# Altium PCB PCB1.PcbDoc
Units mm, origin at the board's own origin, x right, y up, seen from the top; angles counter-clockwise.
Board outline 42.35 x 42.35 mm, 4 copper layers (Top Layer, Int1 (GND), Int2 (PWR), Bottom Layer), stack 1.369 mm thick; 58 components, 58 nets, 242 pads, 94 vias.
Unrouted connection lines stored in the file: 11.
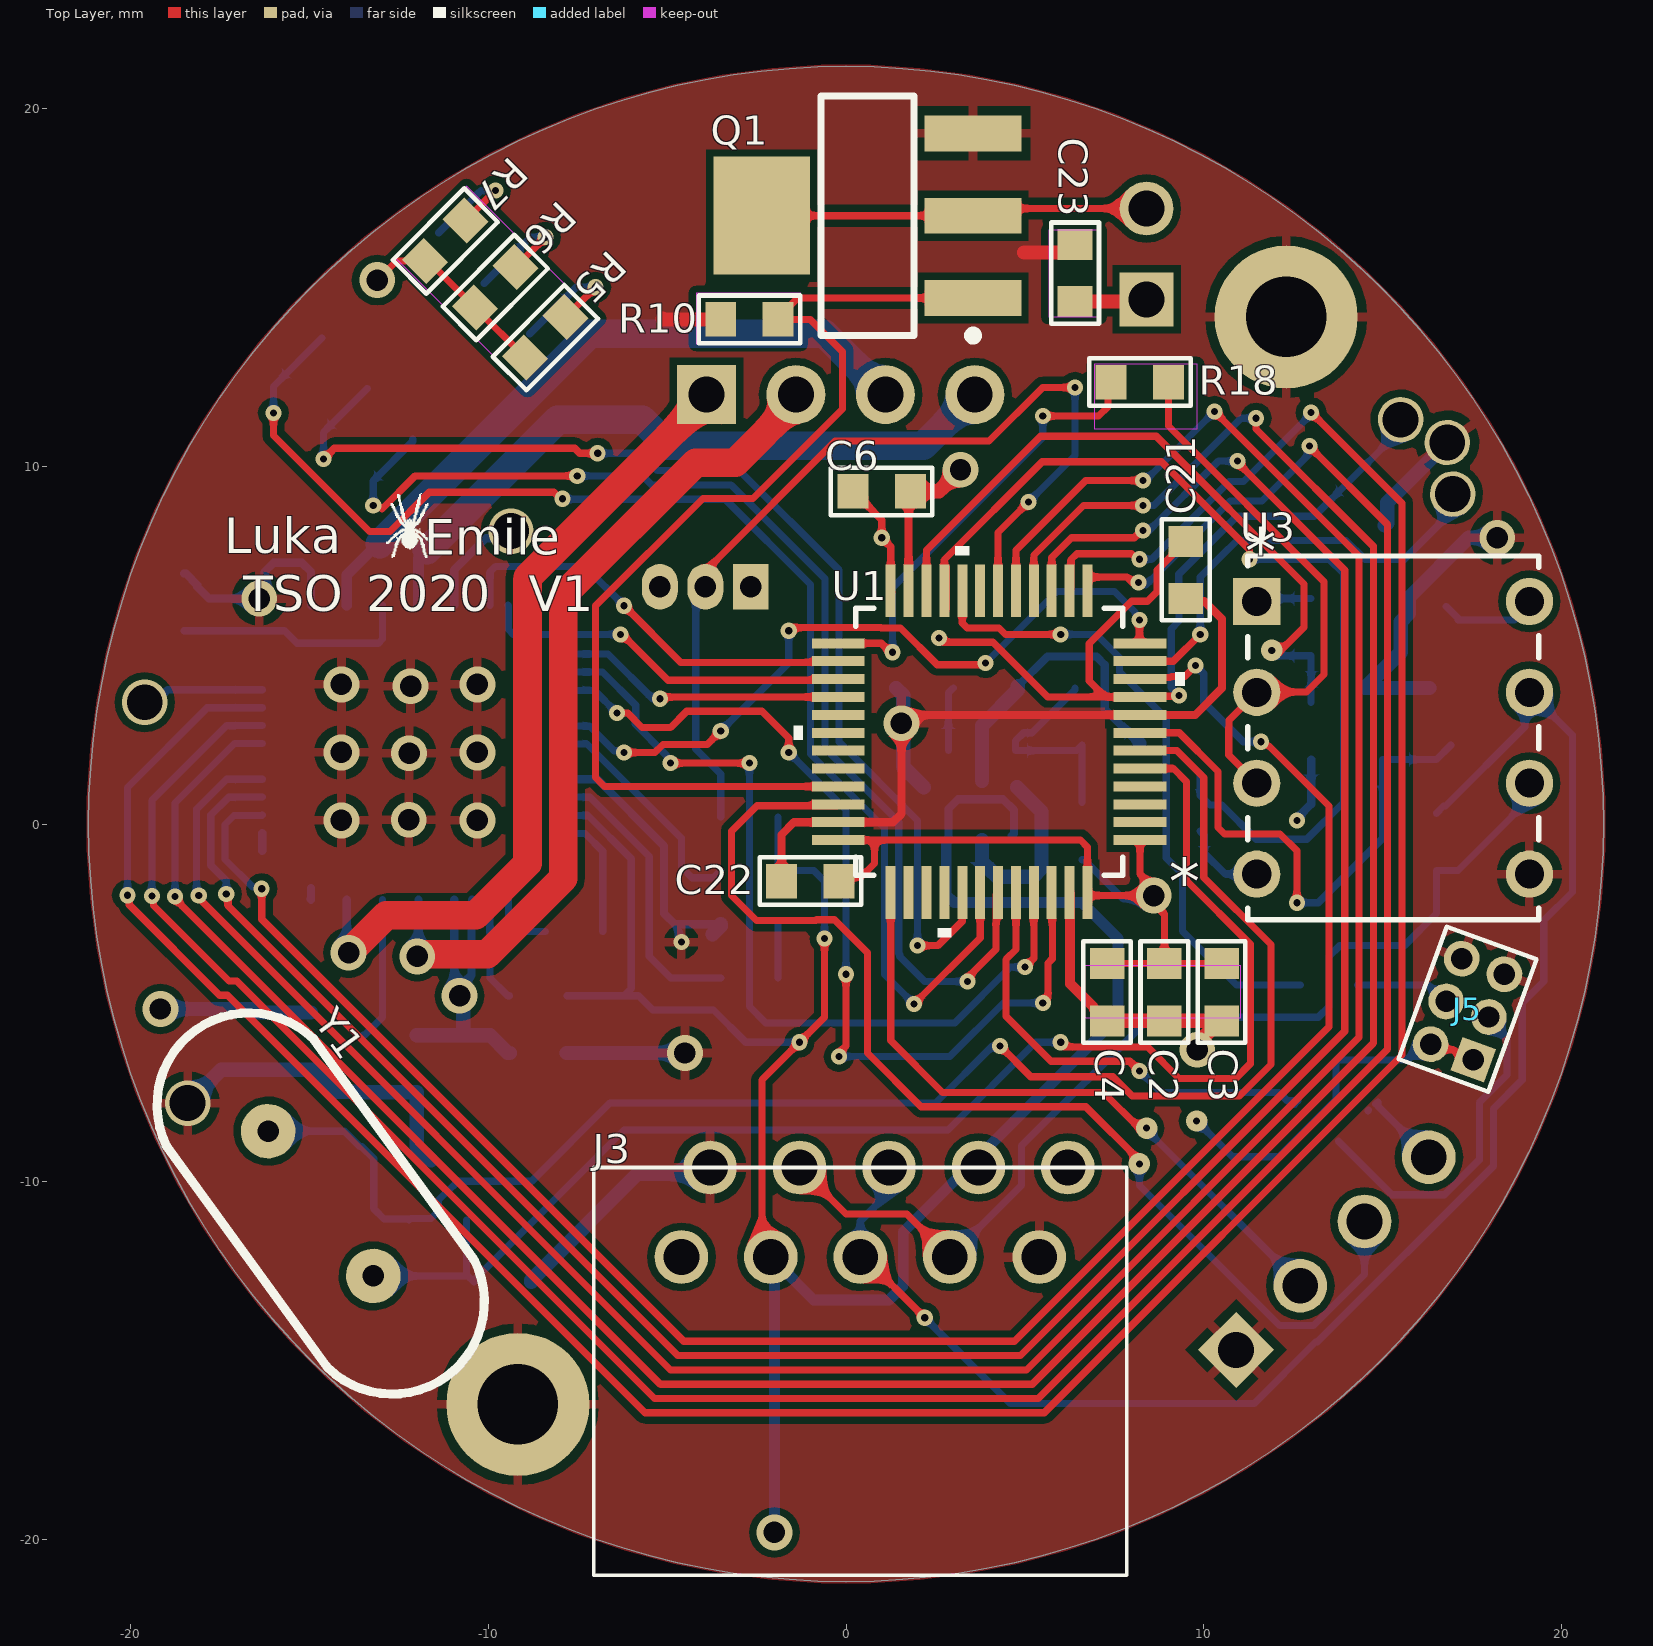
[diagram p0: Top Layer view]
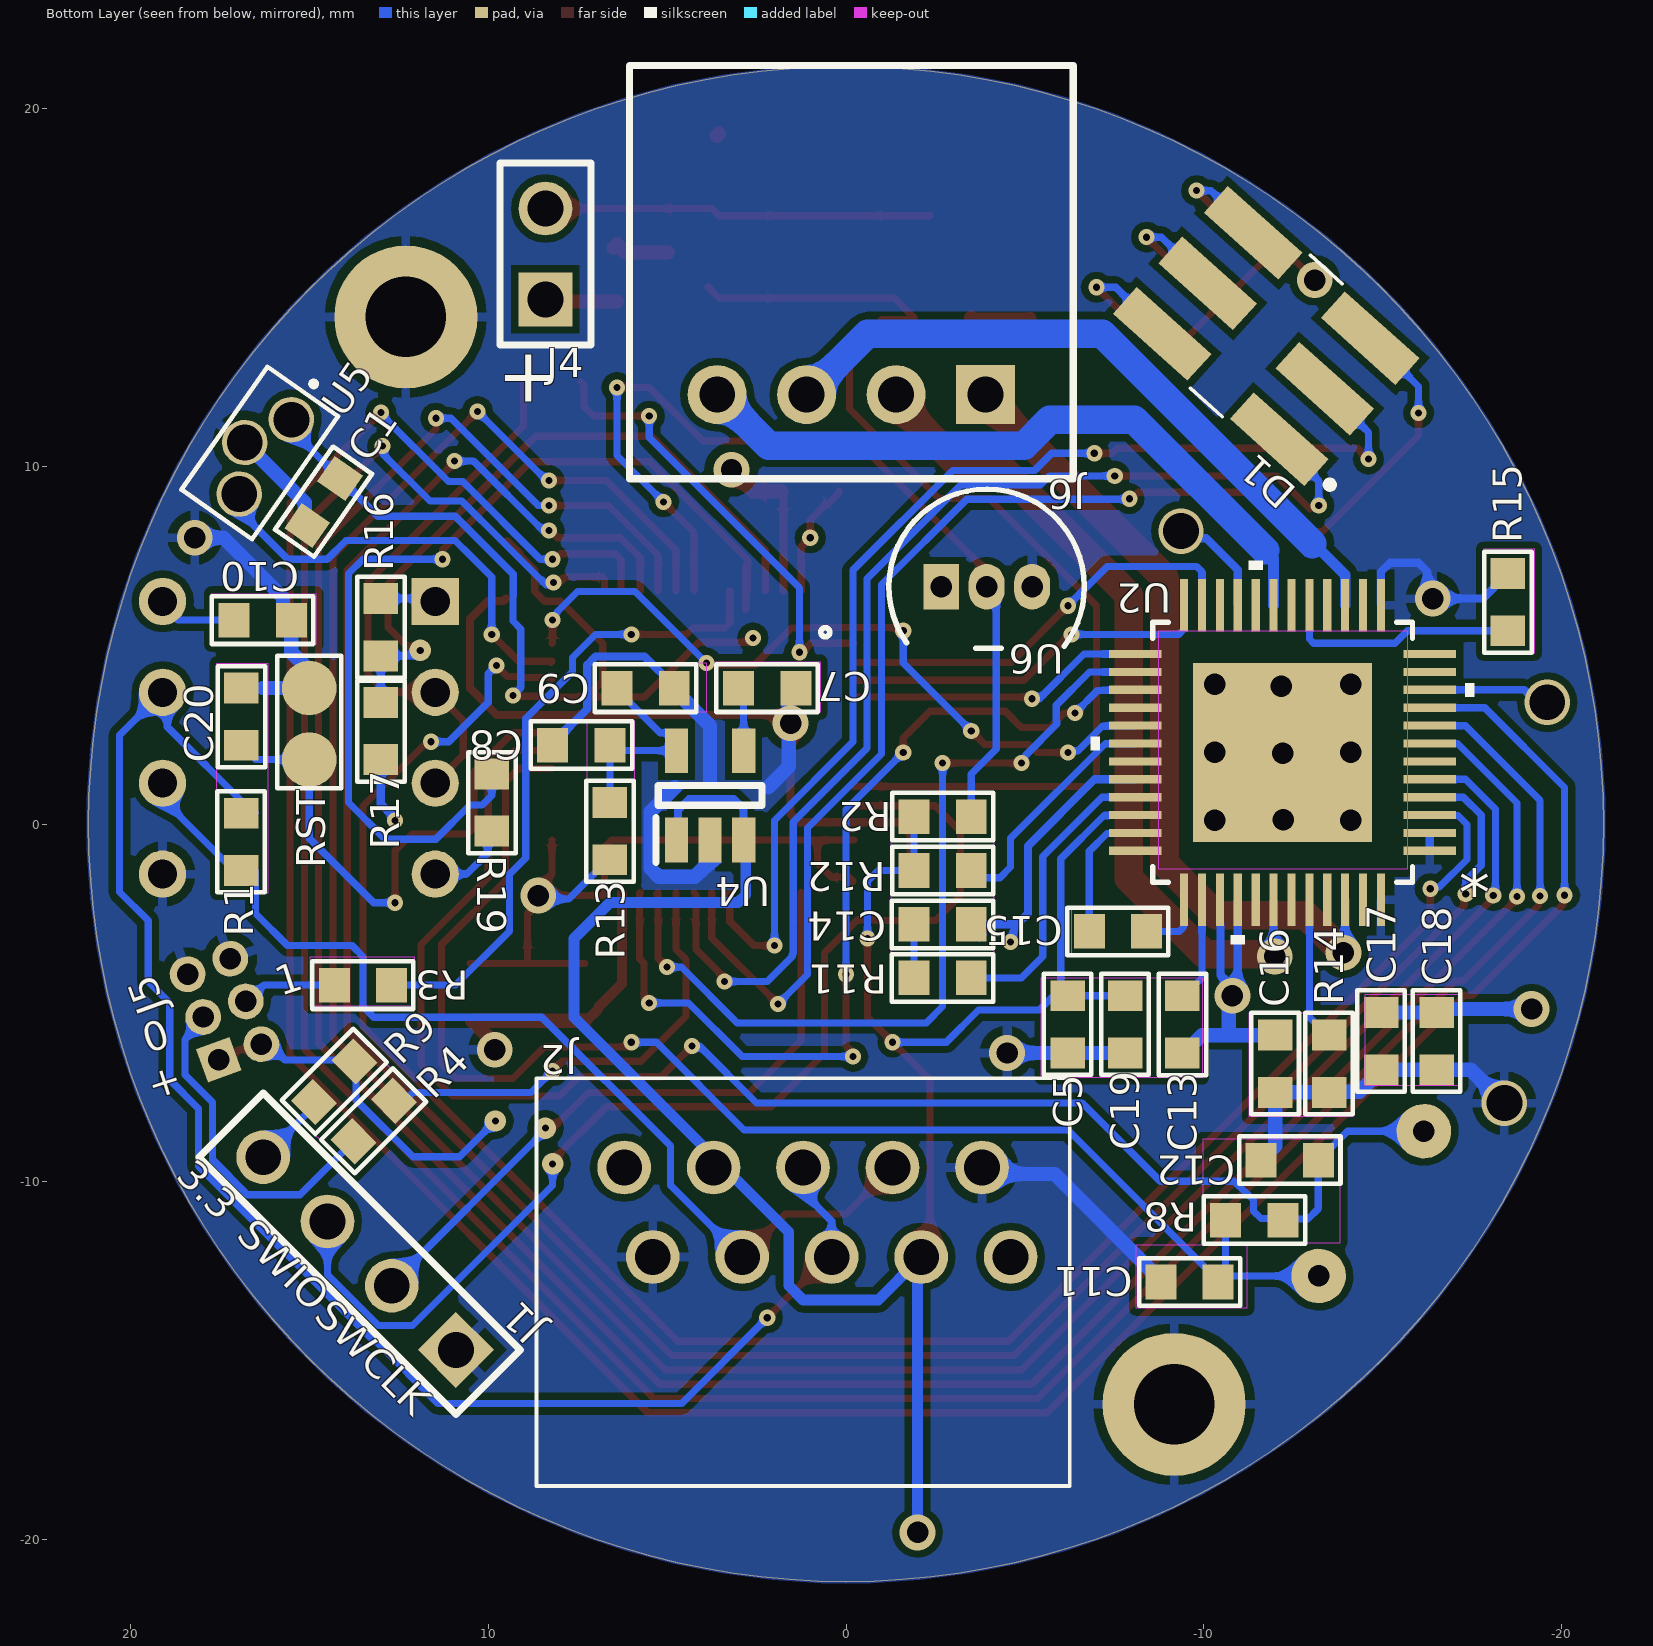
[diagram p1: Bottom Layer view, seen from below]
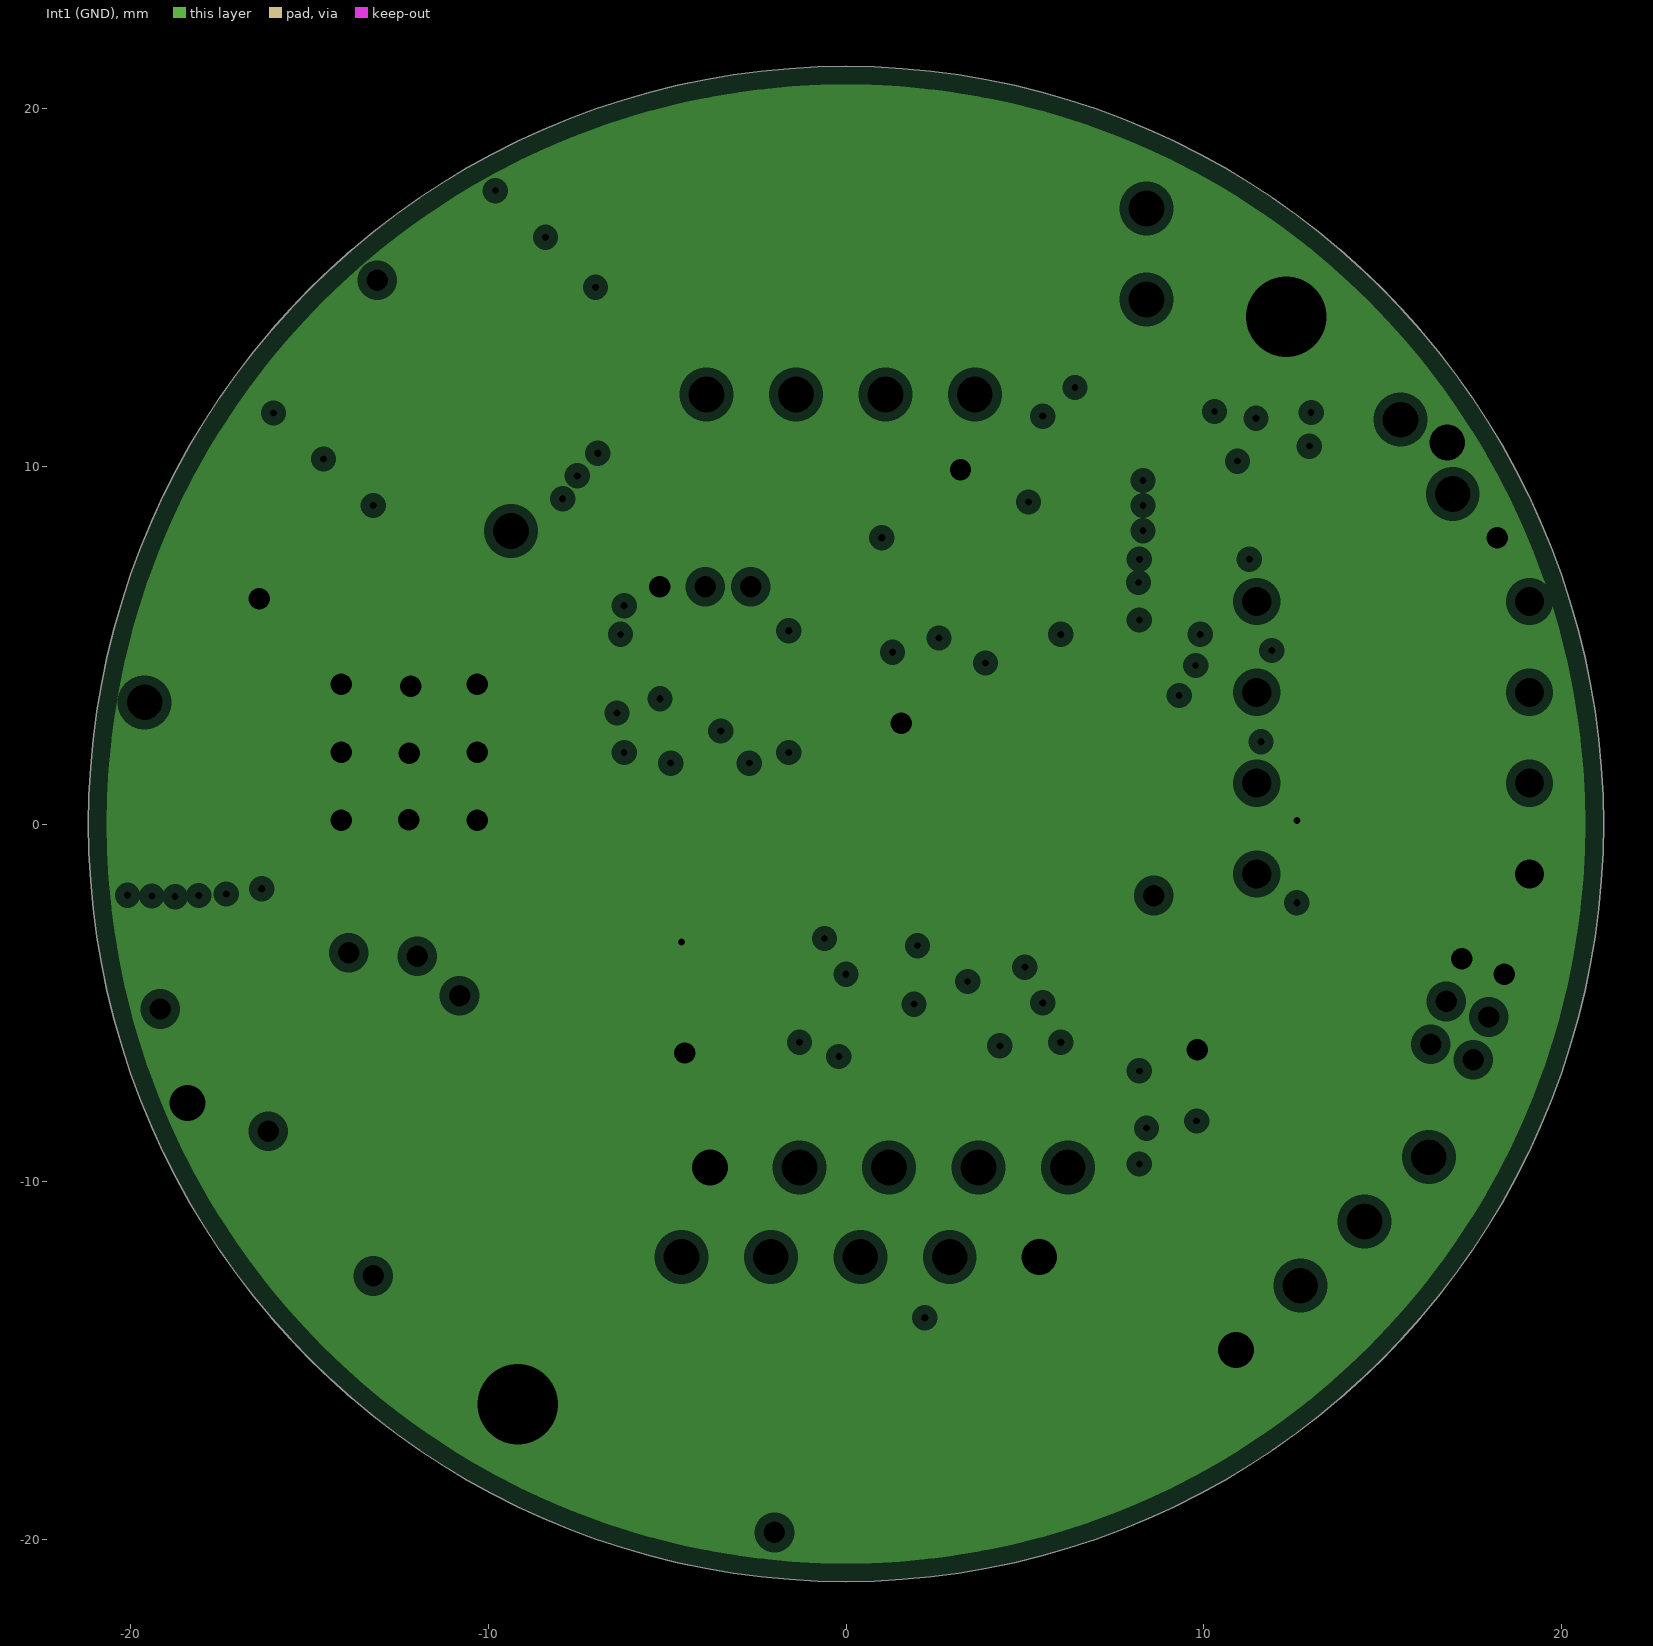
[diagram p2: Int1 (GND), clearances drawn from the general rule]
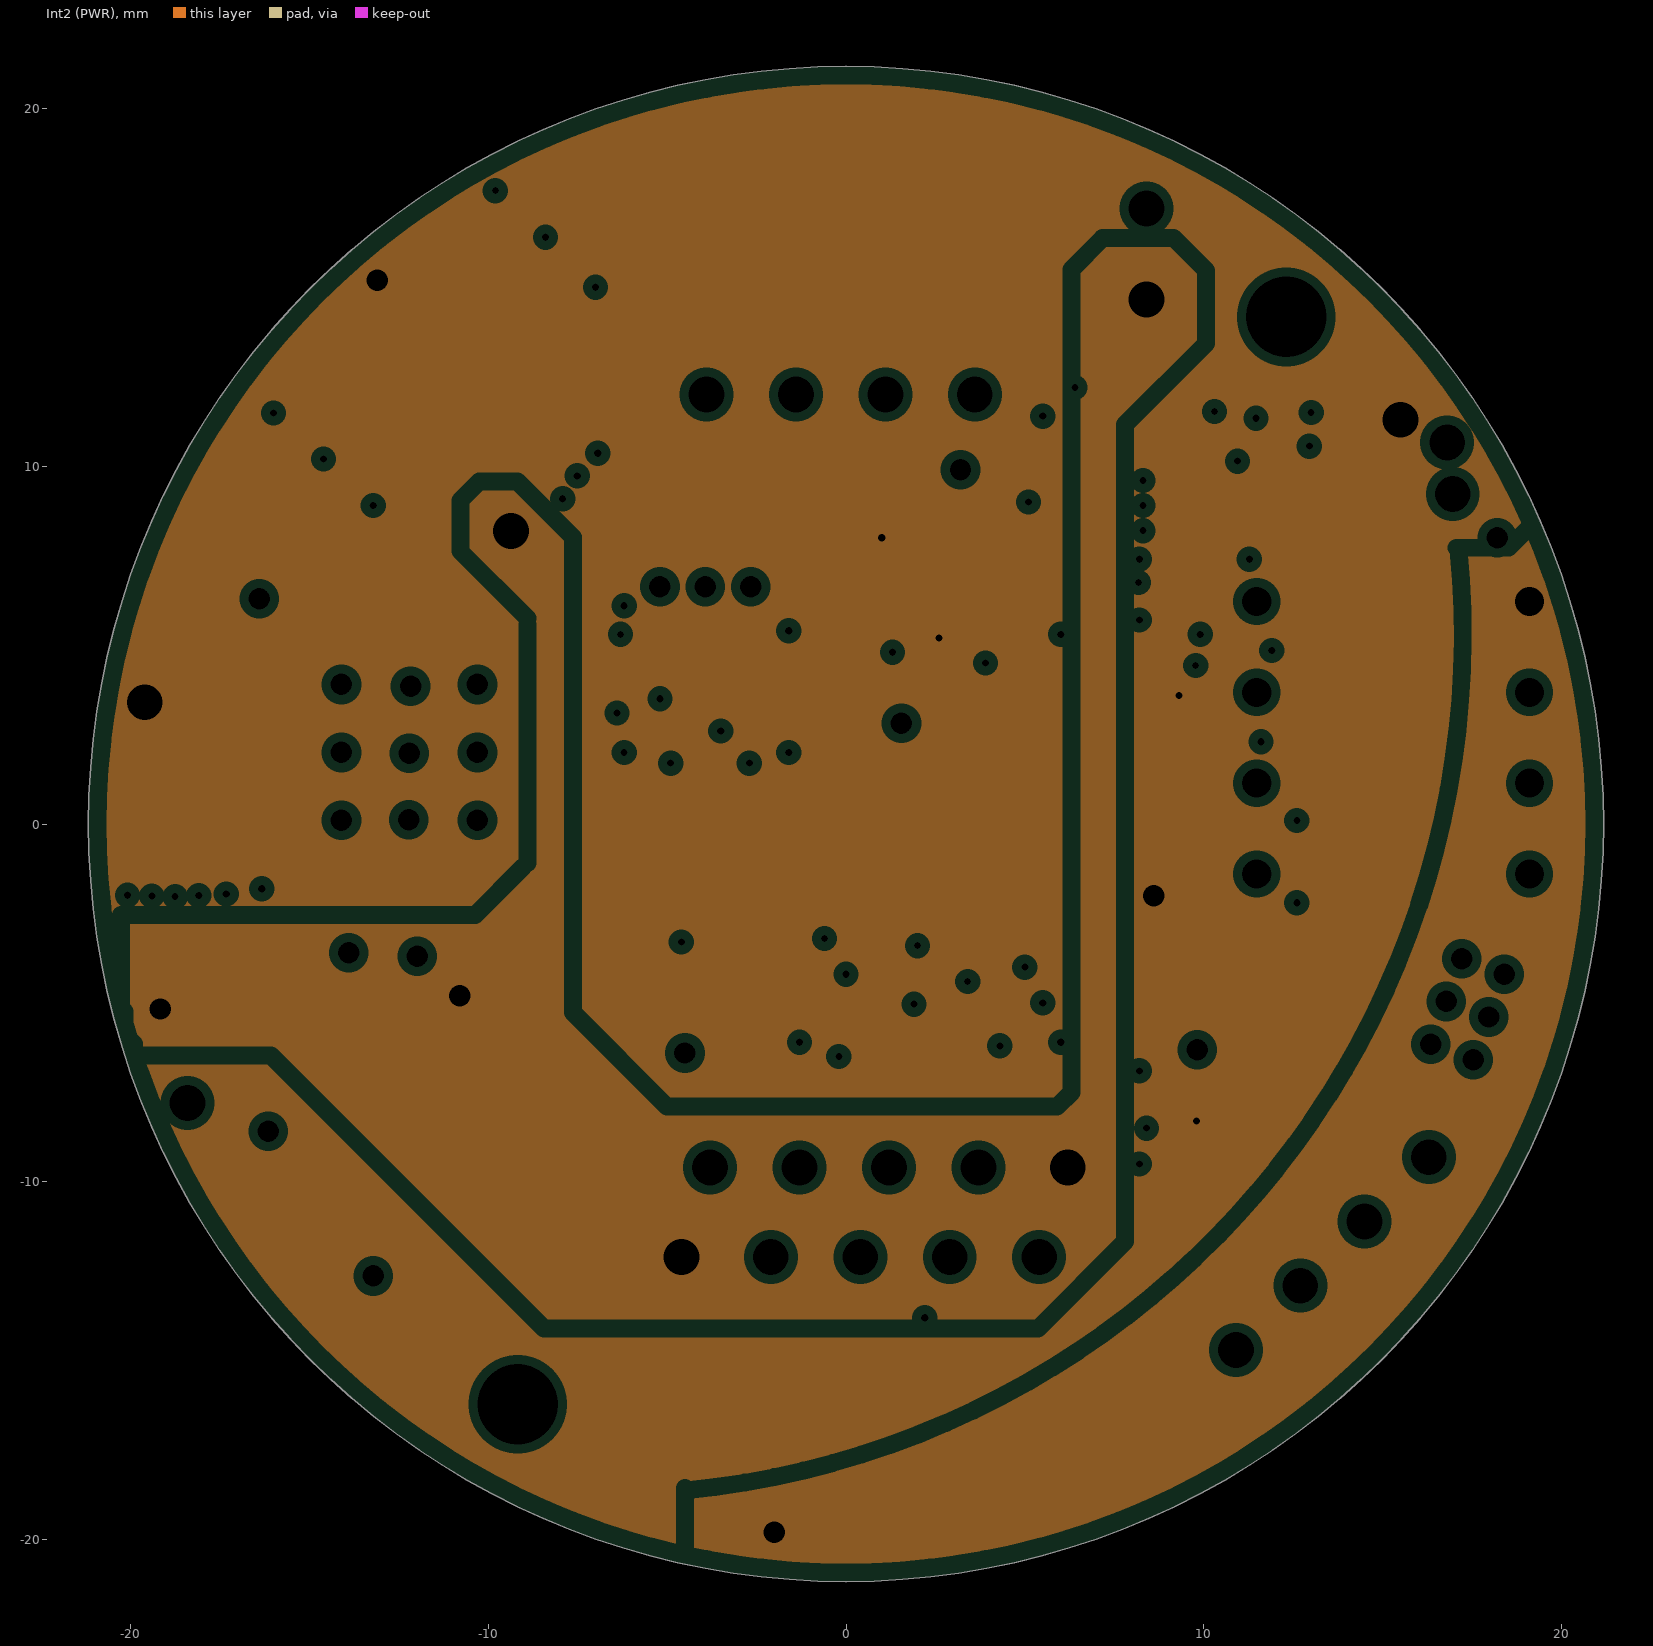
[diagram p3: Int2 (PWR), clearances drawn from the general rule]
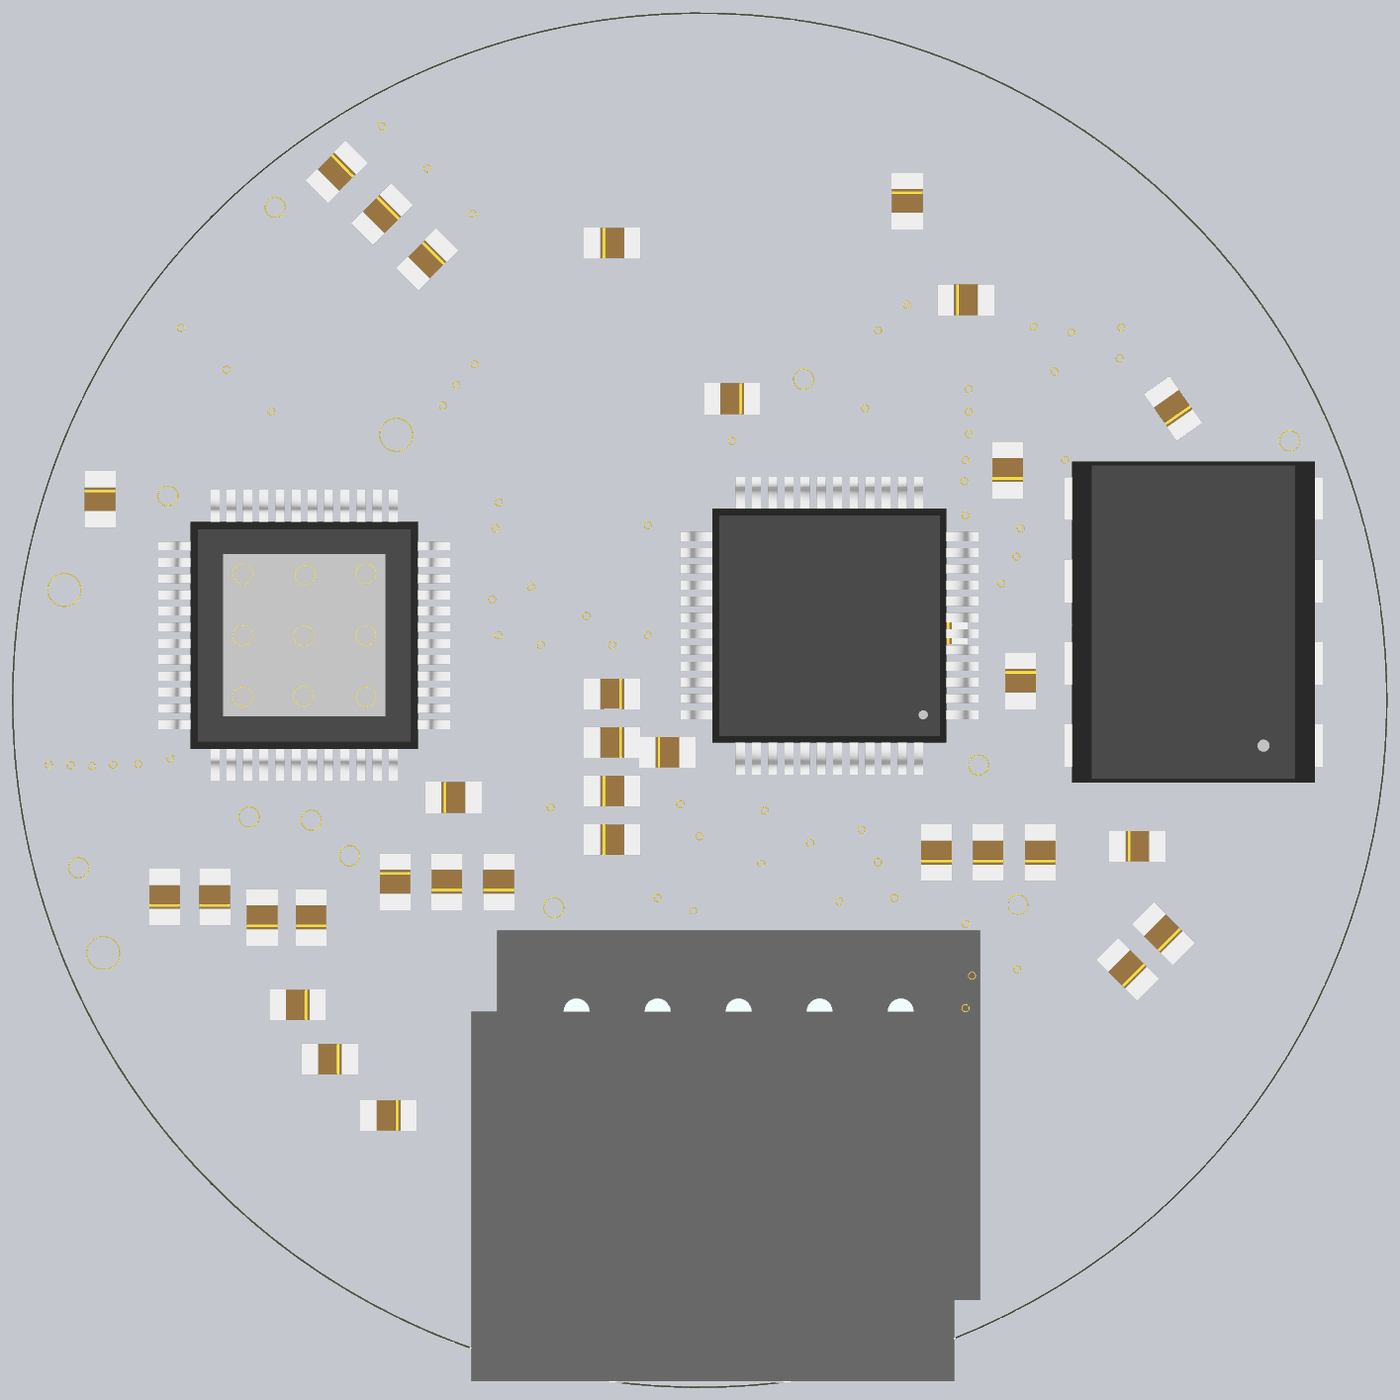
[diagram p4: 3D render of the assembled board from above, using the file's embedded part models]
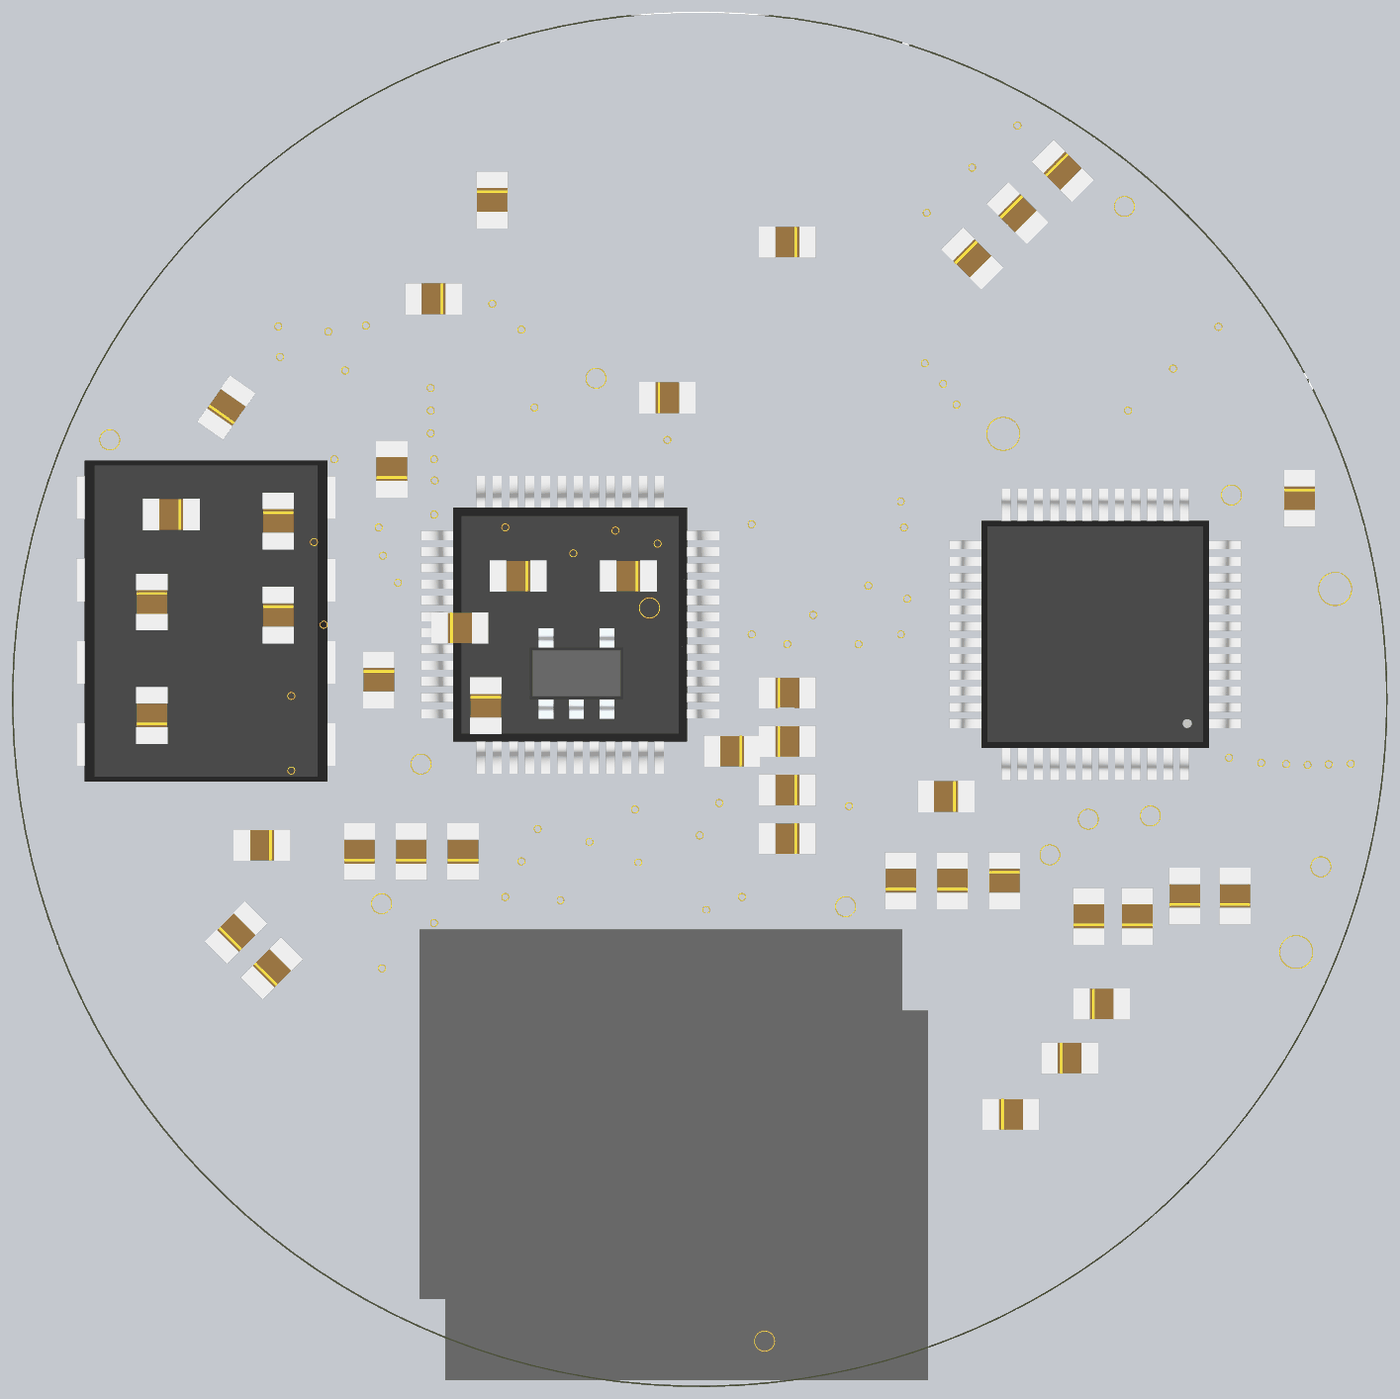
[diagram p5: 3D render of the assembled board from below, using the file's embedded part models]

## Layer stack, top to bottom
Top Solder: solder mask 0.0254, SM-001, Dk 4
Top Layer: signal copper 0.035
Dielectric 1: prepreg 0.1295, PP-017, Dk 4.3
Dielectric 2: prepreg 0.1295, PP-017, Dk 4.3
Int1 (GND): plane copper 0.035, net GND
Dielectric 3: core 0.7112, Core-039, Dk 4.8
Int2 (PWR): plane copper 0.035, net (Multiple Nets)
Dielectric 4: prepreg 0.1295, PP-017, Dk 4.3
Dielectric 5: prepreg 0.1295, PP-017, Dk 4.3
Bottom Layer: signal copper 0.035
Bottom Solder: solder mask 0.0254, SM-001, Dk 4

## Board outline
-21.173,0 ccw(c0,0) 0,-21.173 ccw(c0,0) 21.173,0 ccw(c0,0) 0,21.173 ccw(c0,0)

## Design rules (kind name [scope] priority, off if disabled: settings)
Clearance [All] p1: gap=0.2 ignorepadtopadclearanceinfootprint=TRUE
HoleSize [All] p1 off: absolutevalues=TRUE maxlimit=2.9 minlimit=0.025 maxpercent=80.000 minpercent=20.000
HoleToHoleClearance [All] p1 off: gap=0.254 allowstackedmicrovias=TRUE
MinimumSolderMaskSliver [All] p1 off: minsoldermaskwidth=0.254
PlaneClearance "Larger Routing" [InNet('GND') or InNet('+12') or InNet('OA1') or InNet('OA2') or InNet('OB1') or InNet('OB2')] p1: clearance=0.508
PlaneClearance [All] p2: clearance=0.254
PlaneConnect [All] p1: pad.planeconnectstyle=Relief pad.reliefexpansion=0.508 pad.reliefentries=4 pad.reliefconductorwidth=0.254 pad.reliefairgap=0.254 via.planeconnectstyle=Direct via.reliefexpansion=0.508 via.reliefentries=4 via.reliefconductorwidth=0.254 via.reliefairgap=0.254
PolygonConnect [All] p1: connectstyle=Relief reliefconductorwidth=0.254 reliefentries=4 polygonreliefangle="90 Angle" airgapwidth=0.254
RoutingVias [All] p1: holewidth=0.3 width=0.6 viastyle="Through Hole" minholewidth=0.3 minwidth=0.6 maxholewidth=0.3 maxwidth=0.6
SMDNeckDown [All] p1: percent=50.000
SilkToSilkClearance [All] p1 off: silktosilkclearance=0.254
SilkToSolderMaskClearance [IsPad] p1 off: minsilkscreentomaskgap=0.254 clearancetoexposedcopper=TRUE
SolderMaskExpansion [All] p1 off: expansion=0.102 istentingtop=FALSE
Width "Stepper Wires" [InNet('OA1') or InNet('OA2') or InNet('OB1') or InNet('OB2')] p1: maxlimit=0.8 minlimit=0.229 preferedwidth=0.8 minimp=50.000000 maximp=50.000000 favimp=50.000000
Width "Width Power" [InNet('+12') or InNet('GND') or InNet('5V')] p2: maxlimit=0.4 minlimit=0.2 preferedwidth=0.4 minimp=50.000000 maximp=50.000000 favimp=50.000000
Width [All] p3: maxlimit=0.2 minlimit=0.2 preferedwidth=0.2 minimp=50.000000 maximp=50.000000 favimp=50.000000
23 further rules are at their usual default settings.

## Classes and differential pairs
component class TMC2130: C1 C13 C14 C15 C16 C17 C18 C19 C23 J4 J6 Q1 R2 R10 R11 R12 R14 R15 U2 U5 U6
component class STM32: C2 C3 C4 C5 C6 C7 C8 C9 C10 C11 C12 C20 C21 C22 D1 D2 J1 J2 J3 J5 R1 R3 R4 R5 R6 R7 R8 R9 R13 R16 R17 R18 R19 RST U1 U3 U4 Y1

## Components (designator, comment, footprint, x,y, rotation, side; value= is the part's Value field where it differs from the comment)
C1 "Capacitor SMD" 0603 14.6,9 r125 bottom value=0.1uF
C2 "Capacitor SMD" 0603 8.9,-4.7 r90 top value=0.1uF
C3 "Capacitor SMD" 0603 10.5,-4.7 r90 top value=0.1uF
C4 "Capacitor SMD" 0603 7.3,-4.7 r90 top value=0.1uF
C5 "Capacitor SMD" 0603 -6.2,-5.6 r90 bottom value=1uF
C6 "Capacitor SMD" 0603 1,9.3 r180 top value=1uF
C7 "Capacitor SMD" 0603 2.2,3.8 r0 bottom value=22nF
C8 "Capacitor SMD" 0603 7.4,2.2 r180 bottom value=0.1uF
C9 "Capacitor SMD" 0603 5.6,3.8 r0 bottom value=1uF
C10 "Capacitor SMD" 0603 16.3,5.7 r0 bottom value=0.1uF
C11 "Capacitor SMD" 0603 -9.6,-12.8 r180 bottom value=22pF
C12 "Capacitor SMD" 0603 -12.4,-9.4 r180 bottom value=22pF
C13 "Capacitor SMD" 0603 -9.4,-5.6 r270 bottom value=0.1uF
C14 "Capacitor SMD" 0603 -2.7,-2.8 r0 bottom value=0.1uF
C15 "Capacitor SMD" 0603 -7.6,-3 r0 bottom value=0.1uF
C16 "Capacitor SMD" 0603 -12,-6.7 r90 bottom value=0.1uF
C17 "Capacitor SMD" 0603 -14.96,-6.07 r90 bottom value=0.1uF
C18 "Capacitor SMD" 0603 -16.51,-6.07 r90 bottom value=0.1uF
C19 "Capacitor SMD" 0603 -7.8,-5.6 r90 bottom value=0.1uF
C20 "Capacitor SMD" 0603 16.9,3 r270 bottom value=0.1uF
C21 "Capacitor SMD" 0603 9.5,7.1 r90 top value=0.1uF
C22 "Capacitor SMD" 0603 -1,-1.6 r0 top value=4.7uF
C23 "Capacitor SMD" 0603 6.4,15.4 r270 top value=0.1uF
D1 "LED RGB 5050" "LED 5050" -11.744,13.639 r42 bottom
J1 "SWD-PROG" HDR1X4 10.9,-14.7 r45 bottom
J2 "MAIN_IN" "JST 5POS 2.5mm 90°" 6.2,-9.6 r0 bottom
J3 "MAIN_OUT" "JST 5POS 2.5mm 90°" -4.6,-12.1 r180 top
J4 "FAN" HDR1X2 8.4,14.66 r90 bottom
J5 "BOOT" "Header 3x2 1.27mm SMD" 18.4,-4.2 r340 top
J6 "MOTOR" "JST 4POS 2.5mm 90°" -3.9,12 r0 bottom
Q1 "MOSFET N-CH" SOT223_M 0.6,17 r180 top
R1 "Resistor 0603" 0603 16.9,-0.5 r90 bottom value=120R
R2 "Resistor 0603" 0603 -2.7,0.2 r180 bottom value=?K
R3 "Resistor 0603" 0603 13.5,-4.5 r0 bottom value=10K
R4 "Resistor 0603" 0603 13.2,-8.3 r135 bottom value=10K
R5 "Resistor 0603" 0603 -8.4,13.6 r225 top value=3.3R
R6 "Resistor 0603" 0603 -9.8,15 r225 top value=43R
R7 "Resistor 0603" 0603 -11.2,16.3 r225 top value=3.3R
R8 "Resistor 0603" 0603 -11.41,-11.07 r180 bottom value=10M
R9 "Resistor 0603" 0603 14.3,-7.2 r135 bottom value=NP
R10 "Resistor 0603" 0603 -2.7,14.1 r0 top value=10K
R11 "Resistor 0603" 0603 -2.7,-4.3 r0 bottom value=?K
R12 "Resistor 0603" 0603 -2.7,-1.3 r180 bottom value=15K
R13 "Resistor 0603" 0603 6.6,-0.2 r270 bottom value=0R
R14 "Resistor 0603" 0603 -13.5,-6.7 r90 bottom value=0R
R15 "Resistor 0603" 0603 -18.5,6.2 r270 bottom value=0R
R16 "Resistor 0603" 0603 13,5.5 r270 bottom value=1K
R17 "Resistor 0603" 0603 13,2.6 r270 bottom value=1K
R18 "Resistor 0603" 0603 8.21,12.35 r0 top value=0R
R19 "Resistor 0603" 0603 9.9,0.6 r270 bottom value=0R
RST "PAD RST" PAD 15,3.8 r270 bottom
U1 "STM32F103C8T6" LQFP-48 4,2.3 r180 top value=Value
U2 "TMC2130-TA" ETQFP48_9X9 -12.2,2 r0 bottom value=Value
U3 "MAX485CPA+" "DIP 8 - 3D" 19.1,-1.4 r0 top value=Value
U4 "RT9193-28GB" SOT94P279X130-5N 3.8,0.8 r90 bottom
U5 "AH372-P-B" AH372PB 15.5,11.3 r305 bottom
U6 "LM335Z" TO92 -5.2,7.9 r180 bottom value=Value
Y1 "8M" ATS080B-E -13.21,-12.63 r126 top

## Footprints (in the part's own frame and the unit in brackets; to place one, negate y for a bottom-side part, rotate by r counter-clockwise, add the part's x,y. Pads: shape width x height; smd on the part's side, far side on the other; paste and mask are expansions set on the pad)
0603 [mil]
  rect 34x38 smd: 1(-31.5,0) 2(31.5,0)
  silkscreen extent -56,-26 56,26, body extent -34,-19 34,19, height 35
AH372PB [mm]
  round 1.27 hole 1: 1(0,0) 2(1.27,-0.7) 3(2.54,0)
  silkscreen extent -1.22,-1.4 3.37,1.02
ATS080B-E [mil] "Crystal/ Oscillator 8MHz"
  round 60 hole 23.62: 1(0,0) 2(196.85,0)
  silkscreen extent -137,-100 334,100, body extent -151,-100 348,102, height 157
"DIP 8 - 3D" [mil]
  rect 52x52 hole 32: 1(-300,300)
  round 52 hole 32: 2(-300,200) 3(-300,100) 4(-300,0) 5(0,0) 6(0,100) 7(0,200) 8(0,300)
  silkscreen extent -310,-50 10,350, body extent -310,-45 10,345, height 185
ETQFP48_9X9 [mil]
  rect 58x9 smd paste+0 mask+0: 1(-162,108.27) 2(-162,88.58) 3(-162,68.9) 4(-162,49.21) 5(-162,29.53) 6(-162,9.84) 7(-162,-9.84) 8(-162,-29.53) 9(-162,-49.21) 10(-162,-68.9) 11(-162,-88.58) 12(-162,-108.27) 25(162,-108.27) 26(162,-88.58) 27(162,-68.9) 28(162,-49.21) 29(162,-29.53) 30(162,-9.84) 31(162,9.84) 32(162,29.53) 33(162,49.21) 34(162,68.9) 35(162,88.58) 36(162,108.27)
  rect 9x58 smd paste+0 mask+0: 13(-108.27,-162) 14(-88.58,-162) 15(-68.9,-162) 16(-49.21,-162) 17(-29.53,-162) 18(-9.84,-162) 19(9.84,-162) 20(29.53,-162) 21(49.21,-162) 22(68.9,-162) 23(88.58,-162) 24(108.27,-162) 37(108.27,162) 38(88.58,162) 39(68.9,162) 40(49.21,162) 41(29.53,162) 42(9.84,162) 43(-9.84,162) 44(-29.53,162) 45(-49.21,162) 46(-68.9,162) 47(-88.58,162) 48(-108.27,162)
  rect 197x197 smd paste-98 mask+0: EPAD(0,0)
  silkscreen extent -211,-211 211,211, body extent -177,-177 177,177, height 47
HDR1X2 [mm] "Connector; Header; 2 Position"
  rect 1.5x1.5 hole 1: 1(0,0)
  round 1.5 hole 1: 2(2.54,0)
  silkscreen extent -1.27,-1.27 3.81,1.27
HDR1X4 [mm] "Connector; Header; 4 Position"
  rect 1.5x1.5 hole 1: 1(0,0)
  round 1.5 hole 1: 2(2.54,0) 3(5.08,0) 4(7.62,0)
  silkscreen extent -1.27,-1.27 8.89,1.27
"Header 3x2 1.27mm SMD" [mm]
  rect 1x1 hole 0.6: 1(0,-2.54)
  round 1 hole 0.6: 2(-1.27,-2.54) 3(0,-1.27) 4(-1.27,-1.27) 5(0,0) 6(-1.27,0)
  silkscreen extent -1.97,-3.24 0.7,0.7
"JST 4POS 2.5mm 90°" [mm]
  rect 1.65x1.65 hole 1: 1(0,0)
  round 1.65 hole 1: 2(2.5,0) 3(5,0) 4(7.5,0)
  silkscreen extent -2.45,-9.2 9.95,2.35, body extent -2.45,-9.2 9.95,2.35, height 6
"JST 5POS 2.5mm 90°" [mm]
  round 1.5 hole 1: 1(0,0) 2(-2.5,0) 3(-5,0) 4(-7.5,0) 5(-10,0)
  silkscreen extent -12.45,-2.5 2.45,8.9, body extent -12.45,-2.5 2.45,8.9, height 6.1
"LED 5050" [mm]
  rect 2.8x1 smd: 1(-2.2,1.9) 2(2.2,1.9) 3(-2.2,0) 4(2.2,0) 5(-2.2,-1.9) 6(2.2,-1.9)
  silkscreen extent -4.2,-2.5 0.6,2.5, body extent -2.6,-2.5 2.4,2.6, height 2.7
LQFP-48 [mil]
  rect 58x11 smd: 1(-166,108.27) 2(-166,88.58) 3(-166,68.9) 4(-166,49.21) 5(-166,29.53) 6(-166,9.84) 7(-166,-9.84) 8(-166,-29.53) 9(-166,-49.21) 10(-166,-68.9) 11(-166,-88.58) 12(-166,-108.27) 25(166,-108.27) 26(166,-88.58) 27(166,-68.9) 28(166,-49.21) 29(166,-29.53) 30(166,-9.84) 31(166,9.84) 32(166,29.53) 33(166,49.21) 34(166,68.9) 35(166,88.58) 36(166,108.27)
  rect 11x58 smd: 13(-108.27,-166) 14(-88.58,-166) 15(-68.9,-166) 16(-49.21,-166) 17(-29.53,-166) 18(-9.84,-166) 19(9.84,-166) 20(29.53,-166) 21(49.21,-166) 22(68.9,-166) 23(88.58,-166) 24(108.27,-166) 37(108.27,166) 38(88.58,166) 39(68.9,166) 40(49.21,166) 41(29.53,166) 42(9.84,166) 43(-9.84,166) 44(-29.53,166) 45(-49.21,166) 46(-68.9,166) 47(-88.58,166) 48(-108.27,166)
  silkscreen extent -215,-215 215,215, body extent -181,-181 181,181, height 63
PAD [mil] "pad for connection"
  round 60 smd: 1(0,0) 2(78.74,0)
SOT94P279X130-5N [mm]
  rect 1.25x0.65 smd: 1(-1.25,0.94) 2(-1.25,0) 3(-1.25,-0.94) 4(1.25,-0.94) 5(1.25,0.94)
  silkscreen extent -1.88,-1.45 0.27,1.51, body extent -1.4,-1.45 1.4,1.45, height 1.3
SOT223_M [mm] "SOT223, 4-Leads, Body 6.5x3.5mm, Pitch 2.3mm, Lead Span 7mm, IPC Low Density"
  rect 2.7x1 smd: 1(-2.95,2.3) 2(-2.95,0) 3(-2.95,-2.3)
  rect 2.7x3.3 smd: 4(2.95,0)
  silkscreen extent -3.08,-3.35 1.3,3.47, body extent -1.85,-3.35 1.85,3.35, height 1.7
TO92 [mm]
  rect 1x1.27 hole 0.6: 1(-2.54,-1.27)
  oval 1x1.27 hole 0.6: 2(-1.27,-1.27) 3(0,-1.27)
  silkscreen extent -5.91,-2.98 1.46,1.46, body extent -3.81,-2.8 1.27,1.26, height 4

## Part data
C1 C2 C3 C4 C5 C6 C7 C8 C9 C10 C11 C12 C13 C14 C15 C16 C17 C18 C19 C20 C21 C22 C23: "Capacitor SMD 0603", Manufacturer_Part_Number=12065A820JAT2A, Built_By=EMA_UL_Team, Copyright="Copyright (C) 2018 Accelerated Designs. All rights reserved", RefDes=RefDes, Type=DEV, Vendor="AVX Corporation"
D1: library part 150505M173300, "LED", Manufacturer_Name="Wurth Elektronik", Mouser Part Number=710-150505M173300, RS Part Number=1766248P, Datasheet Link=https://katalog.we-online.de/led/datasheet/150505M173300.pdf, Height=1.8mm, Manufacturer_Part_Number=150505M173300, Mouser Price/Stock=https://www.mouser.com/Search/Refine.aspx?Keyword=710-150505M173300, RS Price/Stock=http://uk.rs-online.com/web/p/products/1766248P
J1: library part "Header 4", "Header, 4-Pin", LatestRevisionDate=17-Jul-2002, LatestRevisionNote="Re-released for DXP Platform.", Publisher="Altium Limited"
J2 J3: library part "JST 5POS", "Connector", Manufacturer_Name="JST (JAPAN SOLDERLESS TERMINALS)", Manufacturer_Part_Number=S5B-XH-A-1(LF)(SN), Datasheet Link=http://www.jst-mfg.com/product/pdf/eng/eXH.pdf, Height=6.1mm
J4: library part "Header 2", "Header, 2-Pin", LatestRevisionDate=17-Jul-2002, LatestRevisionNote="Re-released for DXP Platform.", Publisher="Altium Limited"
J5: library part "Header 3X2", "Header, 3-Pin, Dual row", LatestRevisionDate=17-Jul-2002, LatestRevisionNote="Re-released for DXP Platform.", Publisher="Altium Limited"
J6: library part "JST 4POS", "Connector", Manufacturer_Name="JST (JAPAN SOLDERLESS TERMINALS)", Manufacturer_Part_Number=S4B-XH-A(LF)(SN), RS Part Number=8201589P, Datasheet Link=http://www.jst-mfg.com/product/pdf/eng/eXH.pdf, Height=7mm, RS Price/Stock=http://uk.rs-online.com/web/p/products/8201589P
Q1: "55V 7A SOT223", ComponentLink1Description=Datasheet, ComponentLink1URL=https://assets.nexperia.com/documents/data-sheet/BUK9880-55A.pdf, ComponentLink2Description=Digikey, ComponentLink2URL=https://www.digikey.ca/product-detail/en/BUK9880-55A%2fCUX/1727-2230-1-ND/5361200/?itemSeq=318542302
R1 R2 R3 R4 R5 R6 R7 R8 R9 R10 R11 R12 R13 R14 R15 R16 R17 R18 R19: "Resistor 0603 SMD", Manufacturer_Part_Number=ERJ8CWFR024V, Built_By=EMA_Cory, Copyright="Copyright (C) 2018 Accelerated Designs. All rights reserved", RefDes=RefDes, Type=DEV, Vendor=Panasonic
RST: library part PAD, "SMD Pad for contact"
U1: "Integrated Circuit STM32", Built_By=EMA_UL_Team, Copyright="Copyright (C) 2018 Accelerated Designs. All rights reserved", Manufacturer_Part_Number=STM32F103C8T6, RefDes=RefDes, Type=DEV, Vendor=STMicroelectronics
U2: "Motor Driver TMC2130", Built_By=EMA_Jessica, Copyright="Copyright (C) 2016 Accelerated Designs. All rights reserved", Manufacturer_Part_Number=TMC2130-TA, RefDes=RefDes, Type=DEV, Vendor=TRINAMIC
U3: "RS485 Communication", Built_By=EMA_UL_Team, Copyright="Copyright (C) 2018 Accelerated Designs. All rights reserved", Manufacturer_Part_Number=MAX485CPA+, RefDes=RefDes, Type=DEV, Vendor="Maxim Integrated Products"
U4: "Voltage Regulator 3.3V", Manufacturer_Name=RICHTEK, Datasheet Link=https://componentsearchengine.com/Datasheets/2/RT9193-28GB.pdf, Height=1.295mm, Manufacturer_Part_Number=RT9193-28GB
U5: "Hall Sensor", Manufacturer_Name="Diodes Inc.", Mouser Part Number=621-AH372-P-B, RS Part Number=1333361P, Datasheet Link=https://www.mouser.com/datasheet/2/115/AH372-1317530.pdf, Height=4.75mm, Manufacturer_Part_Number=AH372-P-B, Mouser Price/Stock=https://www.mouser.com/Search/Refine.aspx?Keyword=621-AH372-P-B, RS Price/Stock=http://uk.rs-online.com/web/p/products/1333361P
U6: "Temperature Sensor", Built_By=EMA_UL_Team, Copyright="Copyright (C) 2018 Accelerated Designs. All rights reserved", Manufacturer_Part_Number=LM335Z, RefDes=RefDes, Type=DEV, Vendor=STMicroelectronics
Y1: library part XTAL, "Crystal Oscillator", LatestRevisionDate=17-Jul-2002, LatestRevisionNote="Re-released for DXP Platform.", PackageDescription="Crystal, Thru-Hole; 2 Leads; Body 3.1 x 8.2 mm (Dia.xH)", PackageReference=R38, Published=8-Jun-2000, Publisher="Altium Limited"

## Free pads (board coordinates)
  round 4 hole 2.25: MH1(12.3,14.17) MH2(-9.17,-16.22)

## Via types
v1: diameter 0.45, hole 0.2, Top Layer to Bottom Layer, 65 vias
v2: diameter 1, hole 0.6, Top Layer to Bottom Layer, 22 vias
v3: diameter 0.6, hole 0.2, Top Layer to Bottom Layer, 4 vias
v4: diameter 1.27, hole 1, Top Layer to Bottom Layer, 3 vias

## Nets (pads, with @x,y where several pads share a name; then routed paths per layer and width w, separated by ;. In a path a pad name is that pad's centre, name@x,y a point inside that pad or via, vN(x,y) a via of type N, cw(c..) or ccw(c..) an arc to the next point about the centre after c; other vN are vias at no path point)
5V: C5.2 C10.2 C19.2 J2.2 J3.2 R2.1 R12.1 U2.34 U3.8 U4.1 U4.3 | length 64.8
  Top Layer w0.2: J3.2 -2.35,-11.85 -2.35,-7.15 v1(-1.3,-6.1) -0.6,-5.4 v1(-0.6,-3.2)
  Bottom Layer w0.2: U2.34 -8.071,0.236 -7.208,0.236 -6,-0.973 -6,-4.6 C5.2 ; C19.2 C5.2 ; J3.2 J3.2@-2,-12.2 ; R2.1 R12.1 -0.9,-1.3 -0.6,-1.6 v1(-0.6,-3.2) ; v1(-1.3,-6.1) -2.8,-6.1 -3.7,-5.2 -5.4,-5.2 -5.8,-4.8 C5.2 ; C10.2@16.768,6.083 17.1,5.751 C10.2 18.68,5.7 U3.8@18.8,5.82
  Bottom Layer w0.229: U4.3@2.8,-0.51 U4.3 ; U4.3@2.869,-0.441 2.869,0.426 3.134,0.691 4.387,0.691 4.692,0.386 4.692,-0.273 U4.1@4.628,-0.337
  Bottom Layer w0.3: v2(-2,-19.8) -2,-12.2 -0.9,-13.3 1.2,-13.3 1.6,-12.9 1.6,-11.4 7.6,-5.4 7.6,-3.2 6.596,-2.196 3.017,-2.196 2.8,-1.979 U4.3@2.8,-0.51 ; U4.3 U4.3@2.869,-0.441
5VOUT: C14.2 R11.2 | length 1.5
  Bottom Layer w0.2: R11.2 C14.2
+3.3V: C1.2 C2.2 C3.2 C4.2 C6.2 C21.2 C22.2 J5.1 J5.2 R5.2 R6.2 R7.2 R9.2 R13.2 U1.1 U1.9 U1.24 U1.36 U1.48 U2.10 U5.1 | length 69.5
  Top Layer w0.2: v2@-13.03,15.47 -13.1,15.4 v2(-13.1,15.2) -12.566,15.734 -12.307,15.734 -12.271,15.77 -11.802,15.77 R7.2 -11.666,15.734 R6.2 R5.2 ; U1.36 0.8,-0.45 ; C22.2@-0.185,-1.615 C22.2 -0.085,-1.485 0.415,-1.485 0.8,-1.1 0.8,-0.45 ; C6.2 0.2,9.249 0.532,8.917 0.583,8.917 1,8.5 v1(1,8) 1.25,7.75 U1.24 U1.24@1.29,6.477 ; v1(2.6,5.2) 2.72,5.08 4.109,5.08 5.639,3.55 7.25,3.55 ; C4.2 C2.2 ; U1.1 8.216,-1.4 8.6,-1.784 v2(8.6,-2) ; v1(9.31,3.59) 9.29,3.59 9.272,3.572 8.238,3.572 U1.9 7.25,3.55 ; C21.2 9.449,7.9 9.117,7.568 9.117,7.518 8.7,7.1 8.7,6.5 8.425,6.225 7.983,6.225 6.8,5.042 6.8,4 7.25,3.55 ; C3.2 C2.2 ; J5.2 16.491,-6.306 16.967,-6.306 17.248,-6.587 J5.1 ; 0.8,-0.45 6.55,-0.45 6.75,-0.65 U1.48 6.75,-1.96 6.79,-2 v2(8.6,-2) ; v2(8.6,-2) 8.6,-2.216 8.9,-2.516 C2.2
  Bottom Layer w0.2: v4@-19.478,3.9 -19.6,3.778 v4(-19.6,3.4) -19.31,3.4 -18.96,3.75 U2.10 ; R13.2 6.651,-1 7.751,-2.1 v2@8.208,-2.1 ; v1(9.31,3.59) 9.09,3.81 9.09,5.453 9.31,5.673 9.31,6.368 9.3,6.378 9.3,6.978 10.922,8.6 13.086,8.6 C1.2 15.5,11.014 U5.1 ; v3(9.8,-8.3) 10.8,-9.3 12.103,-9.3 13.698,-7.705 13.698,-6.67 R9.2 13.77,-6.598 15.676,-6.598 16.121,-6.152 J5.2
+12: C13.2 C16.2 C17.2 C18.2 C23.2 J2.1 J3.1 J4.1 U2.21 U2.39 U2.40 | length 18.9
  Top Layer w0.4: C23.2 8.34,14.6 J4.1
  Bottom Layer w0.229: v2@-10.95,-4.65 U2.40 ; U2.21 -10.95,7.095 -10.057,7.988 -9.561,7.988 v4(-9.362,8.187) ; v2@-10.8,-4.565 -10.464,-4.229 -10.464,-2.818 -10.45,-2.804 U2.39@-10.45,-2.115
  Bottom Layer w0.4: v2(-19.16,-5.17) -16.61,-5.17 C18.2 C17.2 ; C16.2 -10.7,-5.9 ; v2@-10.95,-4.65 v2(-10.8,-4.8) ; v2@-10.8,-4.565 v2(-10.8,-4.8) ; C13.2 -9.451,-6.4 -9.951,-5.9 -10.7,-5.9 ; J2.1@6.2,-9.684 J2.1 ; v2(-10.8,-4.8) -10.7,-4.9 -10.7,-5.9
A+: J2.3 J3.3 R1.2 U3.7 | length 44.3
  Top Layer w0.2: J3.3 0.5,-12.1 v1(2.2,-13.8) ; J2.3 J2.3@1.333,-9.467 ; U3.7@18.78,3.28 U3.7@18.8,3.28
  Bottom Layer w0.2: J3.3 0.4,-11.1 1.2,-10.3 J2.3 ; v1(2.2,-13.8) 4.6,-16.2 11.4,-16.2 13.121,-14.479 13.171,-14.479 18.1,-9.551 18.1,-7.948 18.9,-7.148 18.9,-5 19.5,-4.4 19.5,-2.7 20.3,-1.9 20.3,2.48 U3.7 18.97,3.55 18.97,2.72 16.751,0.5 16.7,0.5 R1.2@16.5,0.3
B-: J2.4 J3.4 R1.1 U3.6 | length 29.6
  Top Layer w0.2: J2.4 0,-10.9 1.7,-10.9 J3.4 ; U3.6 19.1,1.04 U3.6@19.2,1.04
  Bottom Layer w0.2: J3.4 4.9,-10.1 4.9,-9 8.5,-5.4 13.2,-5.4 13.5,-5.1 13.5,-3.7 13.8,-3.4 15.6,-3.4 16.5,-2.5 16.5,-1.3 R1.1 17.1,-1.3 18.991,0.591 18.991,1.14 U3.6
BOOT0: J5.3 R4.1 | length 9.6
  Top Layer w0.2: J5.3 J5.3@18.067,-5.495
  Bottom Layer w0.2: R4.1 15.262,-10.362 16.723,-10.362 17.7,-9.385 17.7,-7.782 18.472,-7.01 18.472,-6.018 17.966,-5.512 J5.3
BOOT1: J5.4 R3.2 | length 2.7
  Bottom Layer w0.2: R3.2 16.266,-4.5 16.725,-4.959 J5.4
CPI: C15.1 U2.37 | length 1.9
  Bottom Layer w0.2: U2.37 -9.436,-2.129 -9.436,-2.883 -9.319,-3 C15.1
CPO: C15.2 U2.35 | length 3.7
  Bottom Layer w0.2: U2.35 -8.071,-0.264 -7.296,-0.264 -6.8,-0.76 C15.2
FAN: Q1.1 R10.2 U1.33 | length 30.8
  Top Layer w0.2: U1.33 -6.75,1.05 -7,1.3 -7,6.1 -4,9.1 -2.6,9.1 -0.1,11.6 -0.1,13.2 -1,14.1 R10.2 -1.9,14.151 -1.351,14.7 Q1.1 Q1.1@3.85,15
GND: C1.1 C2.1 C3.1 C4.1 C5.1 C6.1 C7.1 C8.1 C9.1 C10.1 C11.1 C12.1 C14.1 C16.1 C17.1 C18.1 C19.1 C20.1 C21.1 C22.1 C23.1 J1.1 J2.5 J3.5 J5.5 J5.6 pad.MH1 pad.MH2 Q1.3 R10.1 R14.1 R15.1 R17.2 RST.1 U1.8 U1.23 U1.35 U1.47 U2.1 U2.2 U2.13 U2.32 U2.48 U2.EPAD U3.5 U4.2 U5.2 U6.3 | length 100
  Top Layer w0.229: C22.1 -1.8,-0.3 -1.45,0.05 U1.35 1.316,0.05 1.55,0.284 v2(1.55,2.816) 1.784,3.05 U1.8 9.76,3.05 10.505,3.795 10.505,5.735 10.01,6.23 9.57,6.23 C21.1
  Top Layer w0.23: U1.23 1.75,9.25 C6.1
  Top Layer w0.24: U1.47 U1.47@6.267,-1.933 ; C4.1@6.937,-5.188 C4.1@6.937,-5.137 ; C4.1@7.249,-5.5 C4.1
  Top Layer w0.279: U1.47@6.267,-1.933 6.267,-4.467 C4.1@6.937,-5.137 ; C4.1@6.937,-5.188 C4.1@7.249,-5.5
  Top Layer w0.4: -5.128,14.119 -5.109,14.1 R10.1 R10.1@-3.5,14.151 ; J2.5 J2.5@-3.502,-9.6 ; C6.1 2.6,9.3 v2(3.2,9.9) ; Q1.3 Q1.3@3.616,19.234 ; 4.979,15.973 6.173,15.973 C23.1 C23.1@6.5,16.1 ; C4.1 C2.1 10.449,-5.5 9.815,-6.134 v2(9.815,-6.31) ; U5.2@16.778,10.661 U5.2
  Bottom Layer w0.229: R15.1 -18.449,7 -18.132,6.683 -18.132,6.632 -17.8,6.3 v2(-16.4,6.3) -16.237,6.463 -16.237,7.063 -16,7.3 -15.2,7.3 -14.95,7.05 U2.13 ; U2.1 U2.2 ; U2.48@-14.965,-2.1 U2.48 U2.48@-14.95,-1.791 ; U2.32 -6.95,1.25 -5.085,-0.615 -5.085,-2.5 -4.785,-2.8 C14.1 ; -4.751,-2.8 v1(-4.6,-3.3) ; C9.1@4.8,3.851 5.632,4.683 6.997,4.683 7.232,4.448 7.232,3.219 C8.1@8.2,2.251 ; v1(12.6,0.1) 12.6,0.154 13,0.554 R17.2
  Bottom Layer w0.4: v4(-18.4,-7.8) -18.39,-7.8 -17.46,-6.87 C18.1 C17.1 -14.909,-6.87 -14.677,-7.102 -14.677,-7.153 -14.348,-7.482 -13.518,-7.482 R14.1 C16.1 -12,-9 C12.1 ; C11.1 -8.8,-12.749 -5.831,-9.78 -4.26,-9.78 -4.08,-9.6 J2.5 ; C19.1 C5.1 v2(-4.5,-6.4) ; C14.1@-3.732,-3.083 -3.5,-2.851 C14.1 ; C7.1 1.6,3.6 1.6,1.6 2.175,1.025 ; U4.2 3.8,-1.054 4.221,-1.475 5.231,-1.475 5.465,-1.241 5.465,0.341 4.781,1.025 ; 3.8,1.206 3.8,2.749 4.8,3.749 C9.1 C9.1@4.8,3.851 ; C8.1 C8.1@8.2,2.251 ; C1.1 15.124,8.409 15.124,8.983 U5.2 U5.2@16.761,10.661 ; 16.3,3.8 14.5,3.8 15.5,4.8 15.5,5.649 15.732,5.881 15.732,6.332 17.4,8 v2(18.2,8) ; U3.5@19.1,-1.495 U3.5 U3.5@19.266,-1.4
  other v2: -14.1,0.1 -10.3,0.1 -12.22,0.12 -12.21,1.98 -14.1,2 -10.3,2 -12.17,3.85 -14.1,3.9 -10.3,3.9
LEDB: D1.1 U1.43 | length 33
  Top Layer w0.2: v1(-13.213,8.9) -13.165,8.852 -13.023,8.852 -12.971,8.8 -12.041,9.73 v1(-7.51,9.73) ; v1(3.4,-4.4) 3.4,-4.292 4.19,-3.502 4.19,-1.977 U1.43
  Bottom Layer w0.2: v1(-13.213,8.9) -13.213,9.589 -12.107,10.694 D1.1 ; v1(-7.51,9.73) -5.684,9.73 -5.429,9.475 -3.209,9.475 -0.591,6.857 -0.591,2.123 1.475,0.056 1.475,-3.617 1.5,-3.642 1.5,-3.7 2.2,-4.4 v1(3.4,-4.4)
LEDG: D1.5 U1.42 | length 37.7
  Top Layer w0.2: v1(-16,11.487) -16,10.858 -13.317,8.175 -12.745,8.175 -11.647,9.273 -8.162,9.273 -7.979,9.09 v1(-7.92,9.09) ; v1(1.9,-5.034) 3.75,-3.184 U1.42
  Bottom Layer w0.2: v1(-16,11.487) -16,12.229 D1.5 ; v1(-7.92,9.09) -7.905,9.075 -3.375,9.075 -0.991,6.691 -0.991,1.957 1.075,-0.109 1.075,-4.209 v1(1.9,-5.034)
LEDR: D1.3 U1.41 | length 32.2
  Top Layer w0.2: v1(-14.6,10.2) -14.3,10.5 -7.58,10.5 -7.44,10.36 v1(-6.94,10.36) ; v1(2,-3.4) 2.567,-3.4 3.25,-2.717 U1.41
  Bottom Layer w0.2: v1(-14.6,10.2) -14.6,10.946 D1.3 ; v1(-6.94,10.36) -5.748,10.36 -5.263,9.875 -2.975,9.875 -0.191,7.091 -0.191,2.288 2,0.097 v1(2,-3.4)
NetC7_2: C7.2 U4.4 | length 1.8
  Bottom Layer w0.2: U4.4 2.86,3.66 C7.2
NetC8_2: C8.2 C9.2 R13.1 U4.5 | length 6.1
  Bottom Layer w0.2: C9.2 6.4,3.749 5.2,2.549 4.965,2.549 4.74,2.324 U4.5 6.45,2.05 C8.2 R13.1
NetD1_2: D1.2 R5.1 | length 3.6
  Top Layer w0.2: R5.1 v1(-7,15)
  Bottom Layer w0.2: D1.2 -7.537,15 v1(-7,15)
NetD1_4: D1.4 R6.1 | length 3.4
  Top Layer w0.2: R6.1 v1(-8.4,16.4)
  Bottom Layer w0.2: D1.4 -8.82,16.4 v1(-8.4,16.4)
NetD1_6: D1.6 R7.1 | length 3.3
  Top Layer w0.2: R7.1 v1(-9.8,17.7)
  Bottom Layer w0.2: D1.6 -10.204,17.7 v1(-9.8,17.7) v1@-9.8,17.6
NetJ1_4: J1.4 R9.1 | length 2.5
  Top Layer w0.2: J1.4@16.039,-9.063 J1.4
  Bottom Layer w0.2: R9.1@14.585,-8.015 R9.1@14.6,-8 ; R9.1@14.8,-7.828 R9.1@14.814,-7.813 ; R9.1 14.866,-7.889 J1.4
NetJ4_2: J4.2 Q1.2 Q1.4 | length 10.3
  Top Layer w0.2: Q1.4 Q1.2 3.75,17.2 J4.2@7.9,17.2
NetR2_2: R2.2 U1.18 U6.2 | length 26.3
  Top Layer w0.2: U6.2 -3.777,6.783 -3.777,7.223 -0.3,10.7 4,10.7 5.5,12.2 v1(6.4,12.2) ; U1.18 4.25,8.15 v1(5.1,9)
  Bottom Layer w0.2: U6.2 -3.93,6.469 -4.2,6.199 -4.2,2.1 -3.5,1.4 R2.2 ; v1(5.1,9) 6.4,10.3 v1(6.4,12.2)
NetR3_1: R3.1 U1.20 | length 18
  Top Layer w0.2: U1.20 3.25,5.616 3.387,5.48 4.274,5.48 4.454,5.3 v1(6,5.3)
  Bottom Layer w0.2: v1(6,5.3) 7,5.3 7.646,4.654 7.646,4.254 8.95,2.95 8.95,-0.95 9.4,-1.4 9.4,-2.987 10.913,-4.5 R3.1
NetR4_2: R4.2 U1.44 | length 12.7
  Top Layer w0.2: U1.44 4.75,-3.508 4.475,-3.783 4.475,-5.375 5.732,-6.632 7.932,-6.632 v1(8.2,-6.9)
  Bottom Layer w0.2: v1(8.2,-6.9) 8.8,-7.5 12.1,-7.5 12.334,-7.734 R4.2 ; R4.2@12.533,-7.844 R4.2@12.548,-7.829
NetR11_1: R11.1 U2.33 | length 8.3
  Bottom Layer w0.2: U2.33 -7.157,0.75 -5.5,-0.907 -5.5,-3.7 -4.9,-4.3 R11.1
NetR12_2: R12.2 U2.30 | length 6.7
  Bottom Layer w0.2: U2.30 -8.071,2.236 -7.236,2.236 -4.6,-0.4 -4.6,-1.2 -4.3,-1.5 -3.7,-1.5 R12.2
NetR14_2: R14.2 U2.44 | length 4
  Bottom Layer w0.2: R14.2 -13.449,-5.9 -12.95,-5.401 U2.44
NetR15_2: R15.2 U2.17 | length 6.7
  Bottom Layer w0.2: R15.2 -15.69,5.4 -15.34,5.05 -13.067,5.05 -12.95,5.167 U2.17
NetR16_1: R16.1 U3.1 | length 1.4
  Bottom Layer w0.2: U3.1@11.56,6.3 R16.1
NetR18_2: R18.2 U3.2 U3.3 | length 15.2
  Top Layer w0.2: R18.2 9.01,11.12 13.36,6.77 13.36,4.18 12.87,3.69 11.49,3.69 U3.2 10.7,2.9 10.7,2.7 10.695,2.695 10.695,1.925 U3.3
NetR19_2: R19.2 U3.4 | length 2.4
  Bottom Layer w0.2: R19.2 10.015,-0.315 10.015,-0.815 10.6,-1.4 U3.4
NetU1_10: U1.10 U2.3 | length 56.4
  Top Layer w0.2: v1(-16.33,-1.81) -16.33,-2.66 -4.534,-14.456 4.71,-14.456 13.5,-5.666 13.5,0.5 11.821,2.179 11.789,2.179 11.668,2.3 v1(11.6,2.3) ; U1.10 8.256,4.09 9.047,4.09 9.068,4.11 9.077,4.11 9.092,4.125 9.465,4.125 v1(9.77,4.43)
  Bottom Layer w0.2: v1(-16.33,-1.81) -16.378,-1.762 -16.578,-1.762 -17.351,-0.989 -17.351,-0.011 -17.104,0.236 -16.329,0.236 U2.3 ; v1(9.77,4.43) 10,4.2 10,3.4 11.1,2.3 v1(11.6,2.3)
NetU1_11: U1.11 U5.3 | length 12.4
  Top Layer w0.2: U1.11@8.25,4.516 U1.11 9.148,4.55 9.898,5.3 v1(9.9,5.3)
  Bottom Layer w0.2: v1(9.9,5.3) 9.9,6.9 10.5,7.5 10.925,7.925 13.975,7.925 14.5,7.4 15.6,7.4 16.957,8.757 U5.3
NetU1_12: U1.12 U2.29 | length 20.9
  Top Layer w0.2: v1(-6.2,2) -5.342,2 -5.117,2.225 -3.875,2.225 v1(-3.5,2.6) ; v1(-1.6,5.4) -1.51,5.49 0.976,5.49 0.986,5.48 1.52,5.48 2.55,4.45 3.673,4.45 3.675,4.452 3.852,4.452 v1(3.9,4.5) ; v1(8.2,5.7) 8.2,5.066 U1.12
  Bottom Layer w0.2: U2.29 -8.071,2.736 -7.17,2.736 -6.488,2.054 -6.482,2.048 -6.248,2.048 v1(-6.2,2) ; v1(-3.5,2.6) -1.6,4.5 v1(-1.6,5.4) ; v1(3.9,4.5) 5.9,6.5 7.5,6.5 8.079,5.921 8.079,5.889 8.2,5.768 v1(8.2,5.7)
NetU1_13: U1.13 U2.8 | length 77.3
  Top Layer w0.2: v1(-19.4,-2.01) -19.352,-2.058 -19.352,-2.278 -17.245,-4.385 -17.025,-4.385 -5.354,-16.056 5.373,-16.056 15.138,-6.291 15.138,8.362 12.95,10.55 v1(12.95,10.56) ; U1.13 6.75,6.86 6.79,6.9 7.858,6.9 8.008,6.75 v1(8.175,6.75)
  Bottom Layer w0.2: v1(-19.4,-2.01) -19.4,0.657 -17.307,2.75 U2.8 ; v1(8.175,6.75) 8.175,6.678 8.177,6.677 8.385,6.677 9.6,7.892 10.738,9.03 11.63,9.03 12.95,10.35 v1(12.95,10.56)
NetU1_14: U1.14 U2.9 | length 82
  Top Layer w0.2: v1(-20.08,-1.99) -20.032,-2.038 -20.032,-2.258 -17.505,-4.785 -17.285,-4.785 -5.614,-16.456 5.539,-16.456 15.538,-6.456 15.538,8.962 v1(13,11.5) ; U1.14 6.29,6.556 6.29,7.39 6.453,7.553 7.979,7.553 8.132,7.4 v1(8.2,7.4)
  Bottom Layer w0.2: v1(-20.08,-1.99) -20.08,1.02 -17.85,3.25 U2.9 ; v1(8.2,7.4) 8.542,7.4 10.712,9.57 11.112,9.57 13,11.458 v1(13,11.5)
NetU1_15: U1.15 U2.4 | length 69
  Top Layer w0.2: v1(-17.32,-1.958) -17.272,-2.006 -17.272,-2.284 -4.7,-14.856 4.876,-14.856 13.938,-5.794 13.938,7.102 10.94,10.1 v1(10.94,10.14) ; U1.15 5.75,7.45 6.3,8 8.058,8 8.258,8.2 v1(8.3,8.2)
  Bottom Layer w0.2: v1(-17.32,-1.958) -17.32,-1.586 -17.751,-1.154 -17.751,0.249 -17.25,0.75 U2.4 ; v1(8.3,8.2) 8.466,8.2 10.406,10.14 v1(10.94,10.14)
NetU1_16: U1.16 U2.7 | length 76.5
  Top Layer w0.2: v1(-18.75,-2.03) -18.75,-2.098 -18.747,-2.098 -5.189,-15.656 5.207,-15.656 14.738,-6.125 14.738,7.762 11.46,11.04 v1(11.46,11.34) ; U1.16 5.25,7.516 6.634,8.9 v1(8.3,8.9)
  Bottom Layer w0.2: v1(-18.75,-2.03) -18.75,0.59 -17.176,2.164 -17.17,2.164 -17.084,2.25 U2.7 ; v1(8.3,8.9) 8.6,8.9 11.04,11.34 v1(11.46,11.34)
NetU1_17: U1.17 U2.5 | length 73.9
  Top Layer w0.2: v1(-18.09,-2) -18.09,-2.068 -17.965,-2.193 -17.965,-2.195 -4.904,-15.256 5.041,-15.256 14.338,-5.959 14.338,7.492 v1(10.3,11.53) ; U1.17 4.75,7.65 6.7,9.6 v1(8.3,9.6)
  Bottom Layer w0.2: v1(-18.09,-2) -18.151,-1.939 -18.151,0.414 -17.316,1.25 U2.5 ; v1(8.3,9.6) 8.37,9.6 v1(10.3,11.53)
NetU1_26: U1.26 U2.23 | length 11.9
  Top Layer w0.2: v1(-6.2,6.1) -4.616,4.516 -0.25,4.516 U1.26
  Bottom Layer w0.2: U2.23 -9.95,7.05 -9.8,7.2 -7.3,7.2 v1(-6.2,6.1)
NetU1_27: U1.27 U2.24 | length 10.6
  Top Layer w0.2: v1(-6.3,5.3) -6.3,5.342 -4.974,4.016 -0.25,4.016 U1.27
  Bottom Layer w0.2: U2.24 -9.436,6.101 -9.436,5.436 -9.3,5.3 v1(-6.3,5.3)
NetU1_28: U1.28 U2.25 | length 8.4
  Top Layer w0.2: v1(-5.2,3.5) -5.15,3.55 U1.28
  Bottom Layer w0.2: U2.25 -6.65,4.75 -5.4,3.5 v1(-5.2,3.5)
NetU1_45: U1.45 U2.26 | length 24.5
  Top Layer w0.2: v1(-4.9,1.7) v1(-2.7,1.7) ; v1@5.1,-4 v1(5,-4) 5.25,-3.75 U1.45 U1.45@5.29,-1.956
  Bottom Layer w0.2: U2.26 -6.808,4.25 -5.875,3.317 -5.875,2.883 -5.9,2.858 -5.9,2.8 -5.021,1.921 -5.021,1.889 -4.9,1.768 v1(-4.9,1.7) ; v1(-2.7,1.7) -2.7,-5.1 -2.241,-5.559 3.041,-5.559 4.6,-4 v1(5,-4)
NetU1_46: U1.46 U2.27 | length 26.6
  Top Layer w0.2: v1(-6.4,3.1) -6.1,3.1 -5.7,2.7 -4.9,2.7 -4.45,3.15 -2.35,3.15 -1.6,2.4 v1(-1.6,2) ; v1@-0.3,-6.5 0,-6.2 v1(0,-4.2) ; v1(5.5,-5) 5.65,-4.85 5.65,-3.883 5.767,-3.767 5.767,-1.933 U1.46
  Bottom Layer w0.2: U2.27 -8.071,3.736 -7.036,3.736 v1(-6.4,3.1) ; v1(-1.6,2) 0,0.4 v1(0,-4.2) ; v1(-0.2,-6.5) 2.9,-6.5 4.4,-5 v1(5.5,-5)
NRST: C20.2 RST.2 U1.7 | length 15.5
  Top Layer w0.2: U1.7 9.316,2.55 10.4,1.466 10.4,-0.1 10.581,-0.281 12.132,-0.281 12.6,-0.749 v1(12.6,-2.2)
  Bottom Layer w0.2: v1(12.6,-2.2) 13.2,-2.2 15,-0.4 RST.2 16.5,1.8 C20.2
OA1: J6.1 U2.46 | length 22.7
  Top Layer w0.8: v2(-13.9,-3.6) -12.85,-2.55 -10.348,-2.55 -8.9,-1.102 -8.9,6.814 -8.897,6.817 -8.897,6.893 -4.325,11.465 -4.325,11.575 J6.1
  Bottom Layer w0.229: v2@-13.95,-3.55 U2.46
  Bottom Layer w0.4: v2@-13.95,-3.55 v2(-13.9,-3.6)
OA2: J6.2 U2.42 | length 23.4
  Top Layer w0.6: J6.2@-1.4,11.8 J6.2
  Top Layer w0.8: v2(-11.985,-3.7) -11.947,-3.662 -11.805,-3.662 -11.787,-3.643 -10.027,-3.643 -7.9,-1.516 -7.9,6.4 -4.2,10.1 -3.1,10.1 J6.2@-1.4,11.8
  Bottom Layer w0.229: v2@-11.95,-3.65 U2.42
  Bottom Layer w0.4: v2(-11.985,-3.7) -11.95,-3.665 v2@-11.95,-3.65
OB1: J6.3 U2.15 | length 19.4
  Bottom Layer w0.3: U2.15 -13.95,6.961 -13.084,7.827 -13.033,7.827
  Bottom Layer w0.8: -13.033,7.827 -13.033,7.83 -7.163,13.7 -0.6,13.7 J6.3
OB2: J6.4 U2.19 | length 19.3
  Bottom Layer w0.3: U2.19 -11.95,7.41 -11.709,7.651
  Bottom Layer w0.8: -11.709,7.651 -8.06,11.3 -5.699,11.3 -4.974,10.575 2.161,10.575 3.586,12 J6.4
RX: R16.2 R17.1 U1.22 | length 19.6
  Top Layer w0.2: U1.22 2.25,7.65 5.435,10.835 8.673,10.835 12.8,6.708 12.8,5.5 12.1,4.8 12.05,4.85 v3(11.9,4.85)
  Bottom Layer w0.2: v3(11.9,4.85) 11.9,4.8 12,4.7 R16.2 R17.1
RXTX_EN: R18.1 U1.25 | length 12.7
  Top Layer w0.2: U1.25 0.984,5.05 1.234,4.8 v1(1.3,4.8) ; v1(5.5,11.4) 7.06,11.4 7.32,11.66 7.32,12.26 R18.1
  Bottom Layer w0.2: v1@1.252,4.848 v1(1.3,4.8) 1.3,6.6 5.5,10.8 v1(5.5,11.4)
SWCLK: J1.2 U1.37 | length 18.8
  Top Layer w0.2: U1.37 1.25,-6.05 2.7,-7.5 7.2,-7.5 8.2,-8.5 v3(8.4,-8.5) ; J1.2@12.455,-12.655 J1.2@12.683,-12.883
  Bottom Layer w0.2: v3(8.4,-8.5) 8.4,-8.554 12.696,-12.85 J1.2
SWDIO: J1.3 U1.34 | length 31.9
  Top Layer w0.2: U1.34 -0.256,0.51 -2.49,0.51 -3.2,-0.2 -3.2,-2 -2.5,-2.7 -0.842,-2.7 -0.817,-2.675 -0.325,-2.675 0.6,-3.6 0.6,-6.4 2.1,-7.9 6.7,-7.9 8.2,-9.4 v3(8.2,-9.5)
  Bottom Layer w0.2: v3(8.2,-9.5) 8.2,-10.1 12.117,-14.017 13.068,-14.017 14.492,-12.593 J1.3
TX: R19.1 U1.21 | length 27.7
  Top Layer w0.2: U1.21 2.75,7.393 5.483,10.125 8.817,10.125 11.273,7.67 v1(11.273,7.4) ; U1.21@2.8,6 U1.21@2.8,7.2
  Bottom Layer w0.2: R19.1 9.9,0.8 10.168,0.532 10.507,0.532 11.464,-0.425 12.875,-0.425 13.9,0.6 13.9,7 13.5,7.4 v1(11.273,7.4)
VCP: C13.1 U2.38 | length 2.9
  Bottom Layer w0.2: U2.38 -9.95,-4.301 -9.451,-4.8 C13.1
XTAL1_IN: C11.2 R8.1 U1.5 Y1.1 | length 39.6
  Top Layer w0.2: v1(6,-6.1) 6.132,-6.232 8.432,-6.232 9.31,-7.11 10.89,-7.11 11.3,-6.7 11.3,-3.361 9.519,-1.581 9.519,1.181 9.15,1.55 U1.5
  Bottom Layer w0.2: Y1.1 C11.2@-10.57,-12.63 ; R8.1 -10.61,-12.59 C11.2@-10.57,-12.63 ; v1(6,-6.1) 5.3,-6.1 2.85,-8.55 -6.201,-8.55 -10.4,-12.749 C11.2 C11.2@-10.57,-12.63
XTAL1_OUT: C12.2 R8.2 U1.6 Y1.2 | length 43.9
  Top Layer w0.2: v1(4.3,-6.2) 5.163,-7.063 7.462,-7.063 8,-7.6 11,-7.6 11.875,-6.725 11.875,-3.371 10,-1.496 10,1.3 9.25,2.05 U1.6
  Bottom Layer w0.2: Y1.2 -14.015,-8.585 -13.583,-9.017 -13.532,-9.017 -13.2,-9.349 C12.2 -13.2,-10.75 -12.91,-11.04 -12.24,-11.04 R8.2 -12.166,-11.025 -11.595,-11.025 -11.39,-10.82 -11.39,-10.511 -11.166,-10.287 -11.147,-10.287 -10.845,-9.985 -8.785,-9.985 -6.6,-7.8 2.5,-7.8 4.1,-6.2 v1(4.3,-6.2)
pads on no net: U1.2 U1.3 U1.4 U1.19 U1.29 U1.30 U1.31 U1.32 U1.38 U1.39 U1.40 U2.6 U2.11 U2.12 U2.14 U2.16 U2.18 U2.20 U2.22 U2.28 U2.31 U2.36 U2.41 U2.43 U2.45 U2.47 U6.1

## Polygon pours and split planes (outlines as drawn)
GND on Bottom Layer "Bottom Layer-GND" (solid, remove dead copper, pour order 2): -21.213,0 ccw(c0,0) 0,-21.213 ccw(c0,0) 21.213,0 ccw(c0,0) 0,21.213 ccw(c0,0)
no net on Bottom Layer "Bottom Layer-No Net" (solid, pour order 0): 0,0
GND on Top Layer "Top Layer-GND" (solid, remove dead copper, pour order 3): -21.213,0 ccw(c0,0) 0,-21.213 ccw(c0,0) 21.213,0 ccw(c0,0) 0,21.213 ccw(c0,0)
GND on Int1 (GND) (split plane): 217 vertices, not listed, extent -20.664,-20.664 20.664,20.664
+3.3V on Int2 (PWR) (split plane): 285 vertices, not listed, extent -20.664,-20.108 18.868,20.664
5V on Int2 (PWR) (split plane): 19.092,7.908 19.322,7.328 19.534,6.741 19.729,6.148 19.906,5.549 20.064,4.945 20.204,4.337 20.326,3.725 20.429,3.109 20.514,2.491 20.58,1.87 20.627,1.248 20.655,0.624 20.664,0.02 20.662,0 20.664,-0.02 20.655,-0.624 20.627,-1.248 20.58,-1.87 20.514,-2.491 20.429,-3.109 20.326,-3.725 20.204,-4.337 20.064,-4.945 19.906,-5.549 19.729,-6.148 19.534,-6.741 19.322,-7.328 19.092,-7.908 18.844,-8.481 18.579,-9.046 18.298,-9.603 17.999,-10.152 17.684,-10.691 17.353,-11.22 17.007,-11.739 16.644,-12.247 16.267,-12.744 15.875,-13.23 15.468,-13.703 15.047,-14.164 14.612,-14.612 14.164,-15.047 13.703,-15.468 13.23,-15.875 12.744,-16.267 12.247,-16.644 11.739,-17.007 11.22,-17.353 10.691,-17.684 10.152,-17.999 9.603,-18.298 9.046,-18.579 8.481,-18.844 7.908,-19.092 7.328,-19.322 6.741,-19.534 6.148,-19.729 5.549,-19.906 4.945,-20.064 4.337,-20.204 3.725,-20.326 3.109,-20.429 2.491,-20.514 1.87,-20.58 1.248,-20.627 0.624,-20.655 0.02,-20.664 0,-20.662 -0.02,-20.664 -0.624,-20.655 -1.248,-20.627 -1.87,-20.58 -2.491,-20.514 -3.109,-20.429 -3.725,-20.326 -4.251,-20.222 -4.251,-18.853 -4.08,-18.837 -3.405,-18.751 -2.731,-18.646 -2.061,-18.523 -1.395,-18.38 -0.733,-18.219 -0.076,-18.04 0.576,-17.842 1.222,-17.626 1.862,-17.392 2.495,-17.14 3.121,-16.871 3.739,-16.584 4.348,-16.28 4.949,-15.959 5.541,-15.621 6.123,-15.266 6.694,-14.896 7.256,-14.509 7.806,-14.107 8.344,-13.69 8.871,-13.258 9.385,-12.811 9.887,-12.35 10.375,-11.875 10.85,-11.387 11.311,-10.885 11.758,-10.371 12.19,-9.844 12.607,-9.306 13.009,-8.756 13.396,-8.194 13.766,-7.623 14.121,-7.041 14.459,-6.449 14.78,-5.848 15.084,-5.239 15.371,-4.621 15.64,-3.995 15.892,-3.362 16.126,-2.722 16.342,-2.076 16.54,-1.424 16.719,-0.767 16.88,-0.105 17.023,0.561 17.146,1.231 17.251,1.905 17.337,2.58 17.403,3.258 17.451,3.938 17.48,4.619 17.489,5.3 17.48,5.981 17.451,6.662 17.403,7.342 17.391,7.469 18.521,7.469 18.587,7.478 18.647,7.503 18.7,7.543 19.084,7.927
+12 on Int2 (PWR) (split plane): 9.814,15.361 9.814,13.535 7.622,11.343 7.582,11.291 7.556,11.23 7.548,11.165 7.548,-11.566 5.266,-13.848 -8.336,-13.848 -15.892,-6.292 -15.944,-6.252 -16.005,-6.226 -16.07,-6.218 -19.648,-6.218 -19.648,-6.14 -19.656,-6.075 -19.682,-6.014 -19.722,-5.962 -19.81,-5.873 -19.906,-5.549 -19.908,-5.541 -19.908,-5.24 -19.916,-5.175 -19.942,-5.114 -19.982,-5.062 -20.008,-5.042 -20.008,-2.792 -10.36,-2.792 -10.295,-2.784 -10.234,-2.758 -10.182,-2.718 -8.846,-1.383 -8.806,-1.331 -8.798,-1.312 -8.779,-1.304 -8.727,-1.264 -8.687,-1.211 -8.661,-1.151 -8.653,-1.085 -8.653,5.575 -8.661,5.64 -8.671,5.663 -8.661,5.686 -8.653,5.751 -8.661,5.816 -8.687,5.877 -8.727,5.929 -10.527,7.729 -10.527,8.936 -10.147,9.316 -9.287,9.316 -7.881,7.91 -7.881,-5.271 -7.873,-5.336 -7.847,-5.397 -7.807,-5.449 -5.178,-8.078 -5.126,-8.118 -5.065,-8.144 -5,-8.152 5.9,-8.152 5.965,-8.144 6.026,-8.118 6.078,-8.078 6.478,-7.678 6.496,-7.656 6.518,-7.626 6.544,-7.565 6.552,-7.5 6.552,15.396 7.278,16.121 9.053,16.121

## Keep-outs
Top Layer:
  rectangle: 8.807,5.735 10.219,8.559
  region: -10.605,17.83 -12.604,15.831 -8.904,12.131 -6.905,14.13
  rectangle: -4.186,13.417 -1.268,14.837
  rectangle: 5.663,14.173 7.083,16.587
  rectangle: 6.939,11.05 9.813,12.851
  rectangle: 6.679,-5.412 11.027,-3.957
  region: 6.939,12.851
Bottom Layer:
  region: 15.795,-7.73 13.806,-5.741 11.741,-7.806 13.73,-9.795
  rectangle: 12.068,-5.094 14.969,-3.706
  rectangle: 16.163,-1.932 17.583,4.486
  rectangle: 14.814,5.017 17.732,6.437
  rectangle: -19.237,4.768 -17.817,7.686
  rectangle: 5.917,-1.632 7.232,2.883
  rectangle: 3.9,3.117 7.032,4.5
  rectangle: 0.714,3.117 3.632,4.537
  rectangle: -4.132,-4.983 -1.268,0.883
  rectangle: -9.032,-3.683 -6.306,-2.317
  rectangle: -9.95,-7.086 -5.463,-4.301
  rectangle: -11.202,-13.537 -8.114,-11.758
  rectangle: -13.799,-11.715 -9.978,-8.801
  rectangle: -14.15,-8.186 -11.263,-5.268
  rectangle: -17.193,-7.317 -14.513,-4.753
  rectangle: -15.69,-1.271 -8.741,5.4

## Other copper
Int2 (PWR) (plane layer: these items are gaps in the copper):
  lines w0.254: -20.26,-5.14 -20.16,-5.24 ; -9.025,-1.205 -8.905,-1.085
  lines w0.4: -8.905,5.575 -8.905,5.751
  lines w0.5: -20.26,-5.14 -20.26,-2.54 -10.36,-2.54 -9.025,-1.205 ; -20.16,-5.24 -20.16,-5.88 -19.9,-6.14 -19.9,-6.47 -16.07,-6.47 -8.44,-14.1 -5.4,-14.1 ; -8.905,-1.085 -8.905,5.575 ; -8.905,5.751 -10.779,7.625 -10.779,9.04 -10.251,9.568 -9.183,9.568 -7.629,8.014 -7.629,-5.271 -5,-7.9 5.9,-7.9 6.3,-7.5 6.3,15.5 7.173,16.373 8.938,16.373 9.158,16.373 10.066,15.465 10.066,13.431 7.8,11.165 7.8,-11.67 5.37,-14.1 -6,-14.1 ; -4.503,-20.797 -4.503,-18.556 ; -4.497,-18.626 ccw(c-6.8,5.3) 17.121,7.656 ; 17.062,7.721 18.521,7.721 19.4,8.6

## Silkscreen, mask and mechanical layers (free items; w line width, h text height)
Top Overlay:
  drawing of 217 lines, arcs and shapes, not listed
  text "Luka" at -17.38,7.57 h1
  text "Emile" at -11.78,7.53 h1
  text "TSO" at -16.84,5.94 h1
  text "2020" at -13.41,5.94 h1
  text "V1" at -8.86,5.94 h1
Bottom Overlay:
  lines w0.127: 14.1,1 14.1,4.7 15.9,4.7 15.9,1 14.1,1
  text "+" at 9.746,11.8 h1.52
  text "1" at 15.802,-4.807 h0.82 r342
  text "0" at 18.823,-6.192 h0.82 r342
  text "+" at 18.481,-7.432 h0.82 r342
  text "3.3" at 18.764,-9.87 h0.82 r45
  text "SWIO" at 17.064,-11.53 h0.82 r45
  text "SWCLK" at 14.904,-13.78 h0.82 r45
Board:
  circle w0.254: c0,0 r21.213
  pour cut-out: -6.4,20.4

## Text inside footprints (layer, text, board x,y; h text height)
U1: Top Overlay "*" at 9.905,-0.446 h1.27 r180; Mechanical 13 "*" at 7.543,-0.065 h1.27 r180
U2: Bottom Overlay "*" at -18.004,-0.746 h1.27 r180; Mechanical 13 "*" at -15.642,-0.365 h1.27 r180
U3: Top Overlay "*" at 11.162,7.007 h1.27; Mechanical 13 "*" at 11.289,5.585 h1.27